# Altium PCB ufd.PcbDoc
Units mil, origin at the board's own origin, x right, y up, seen from the top; angles counter-clockwise.
Board outline 9000 x 7000 mil, 8 copper layers (Top Layer, Ground, Signal, Power, Power2, Signal2, Ground2, Bottom Layer); 77 components, 62 nets, 719 pads, 54 vias.
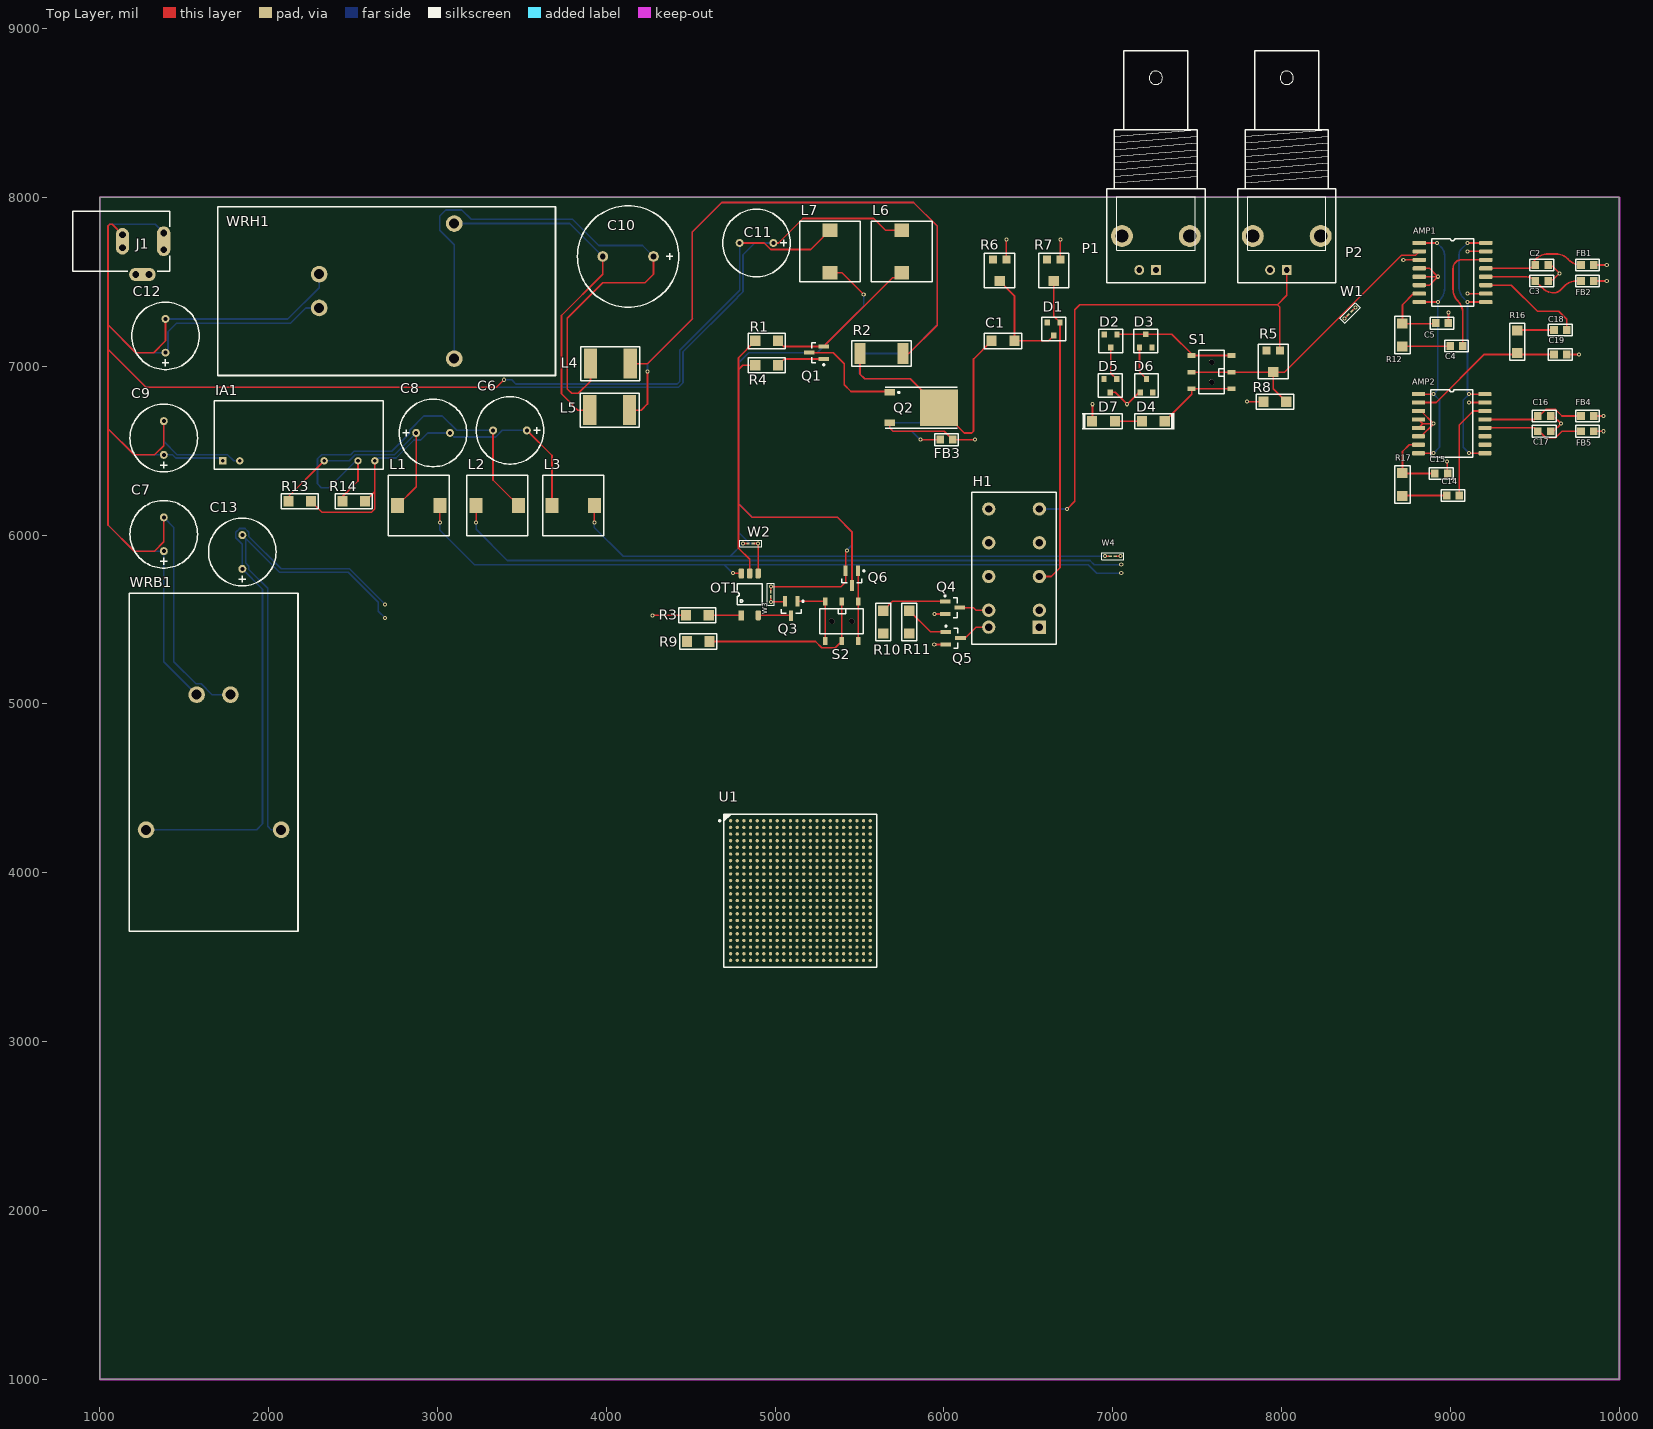
[diagram p0: Top Layer view]
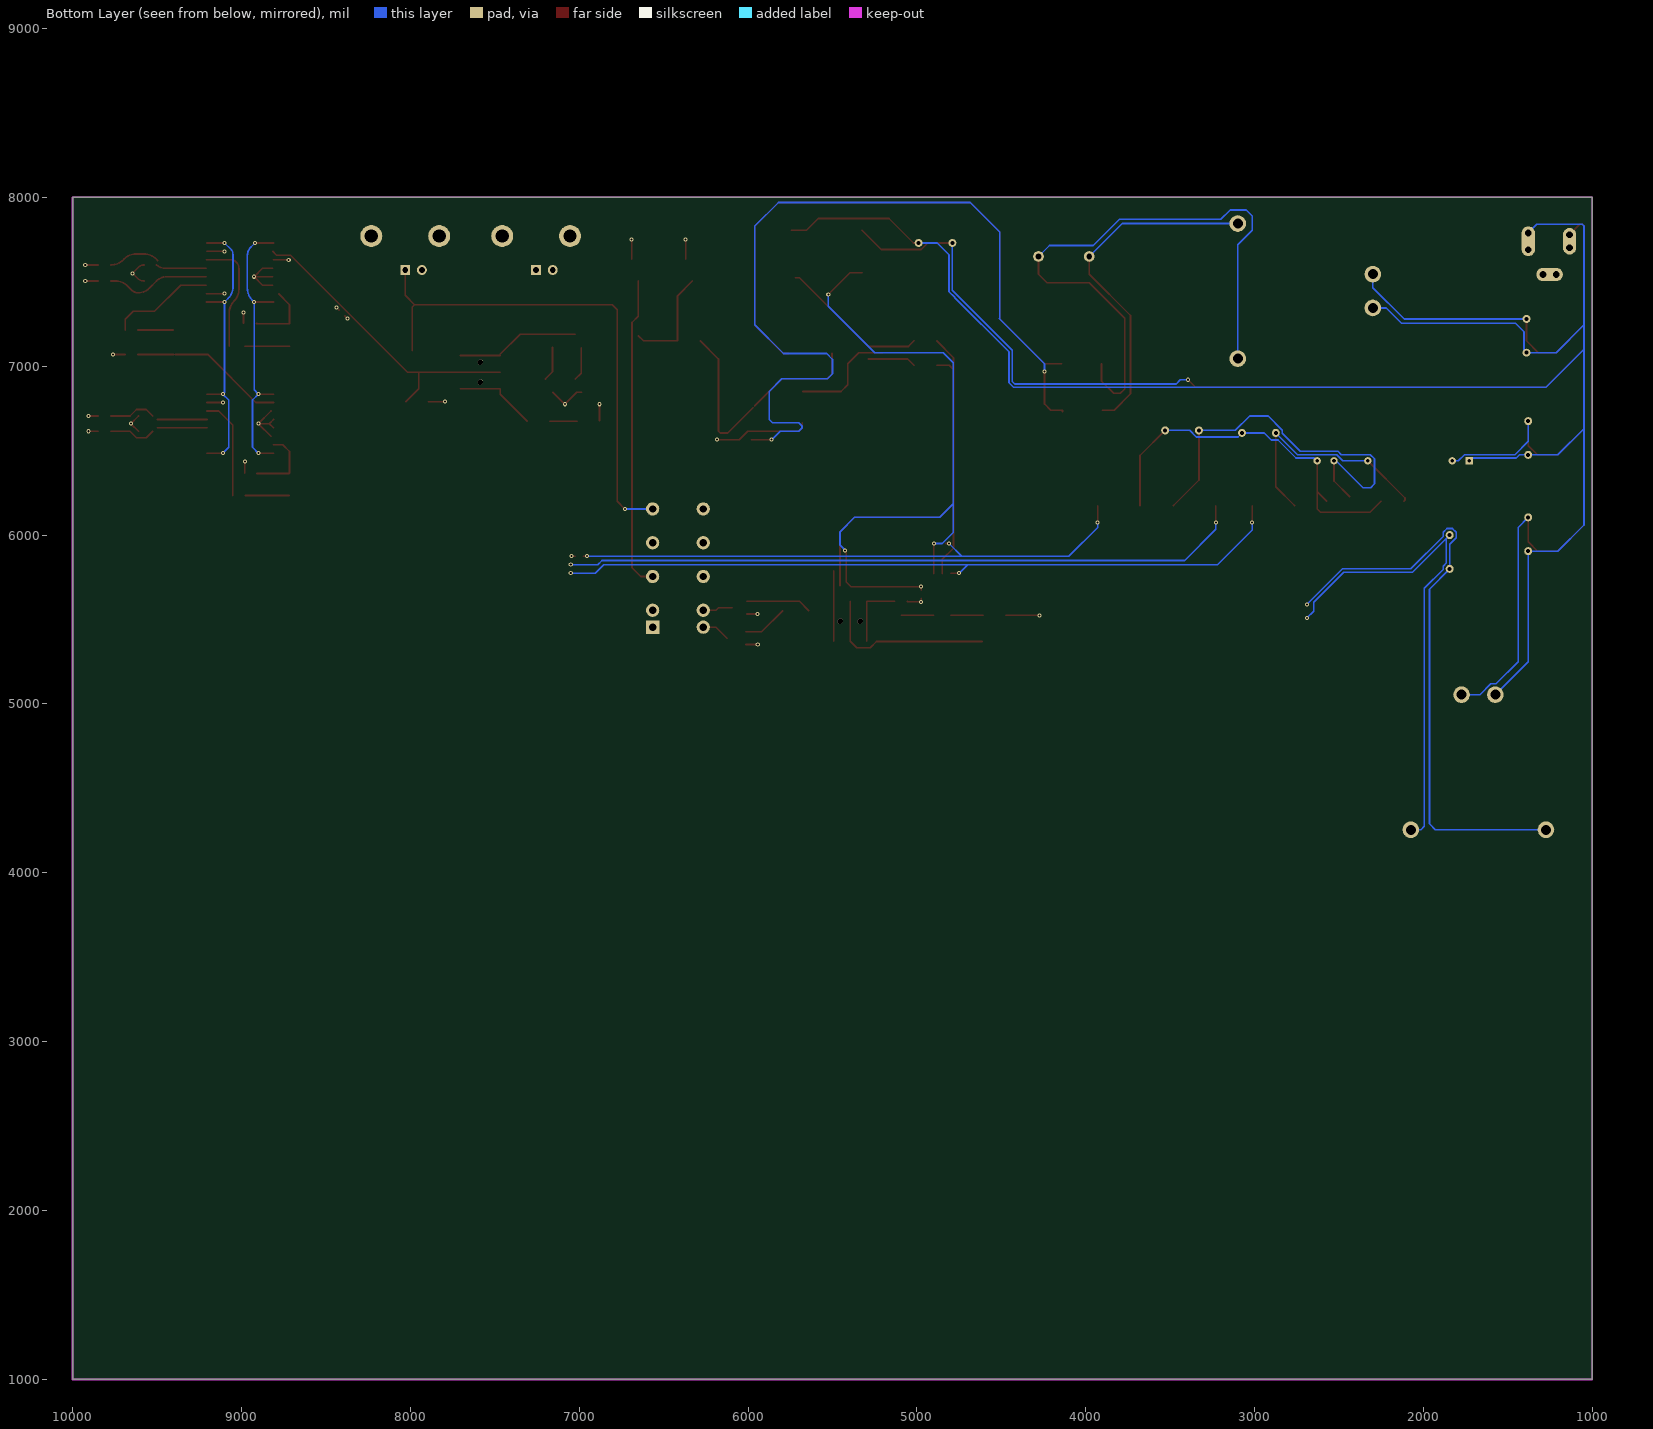
[diagram p1: Bottom Layer view, seen from below]
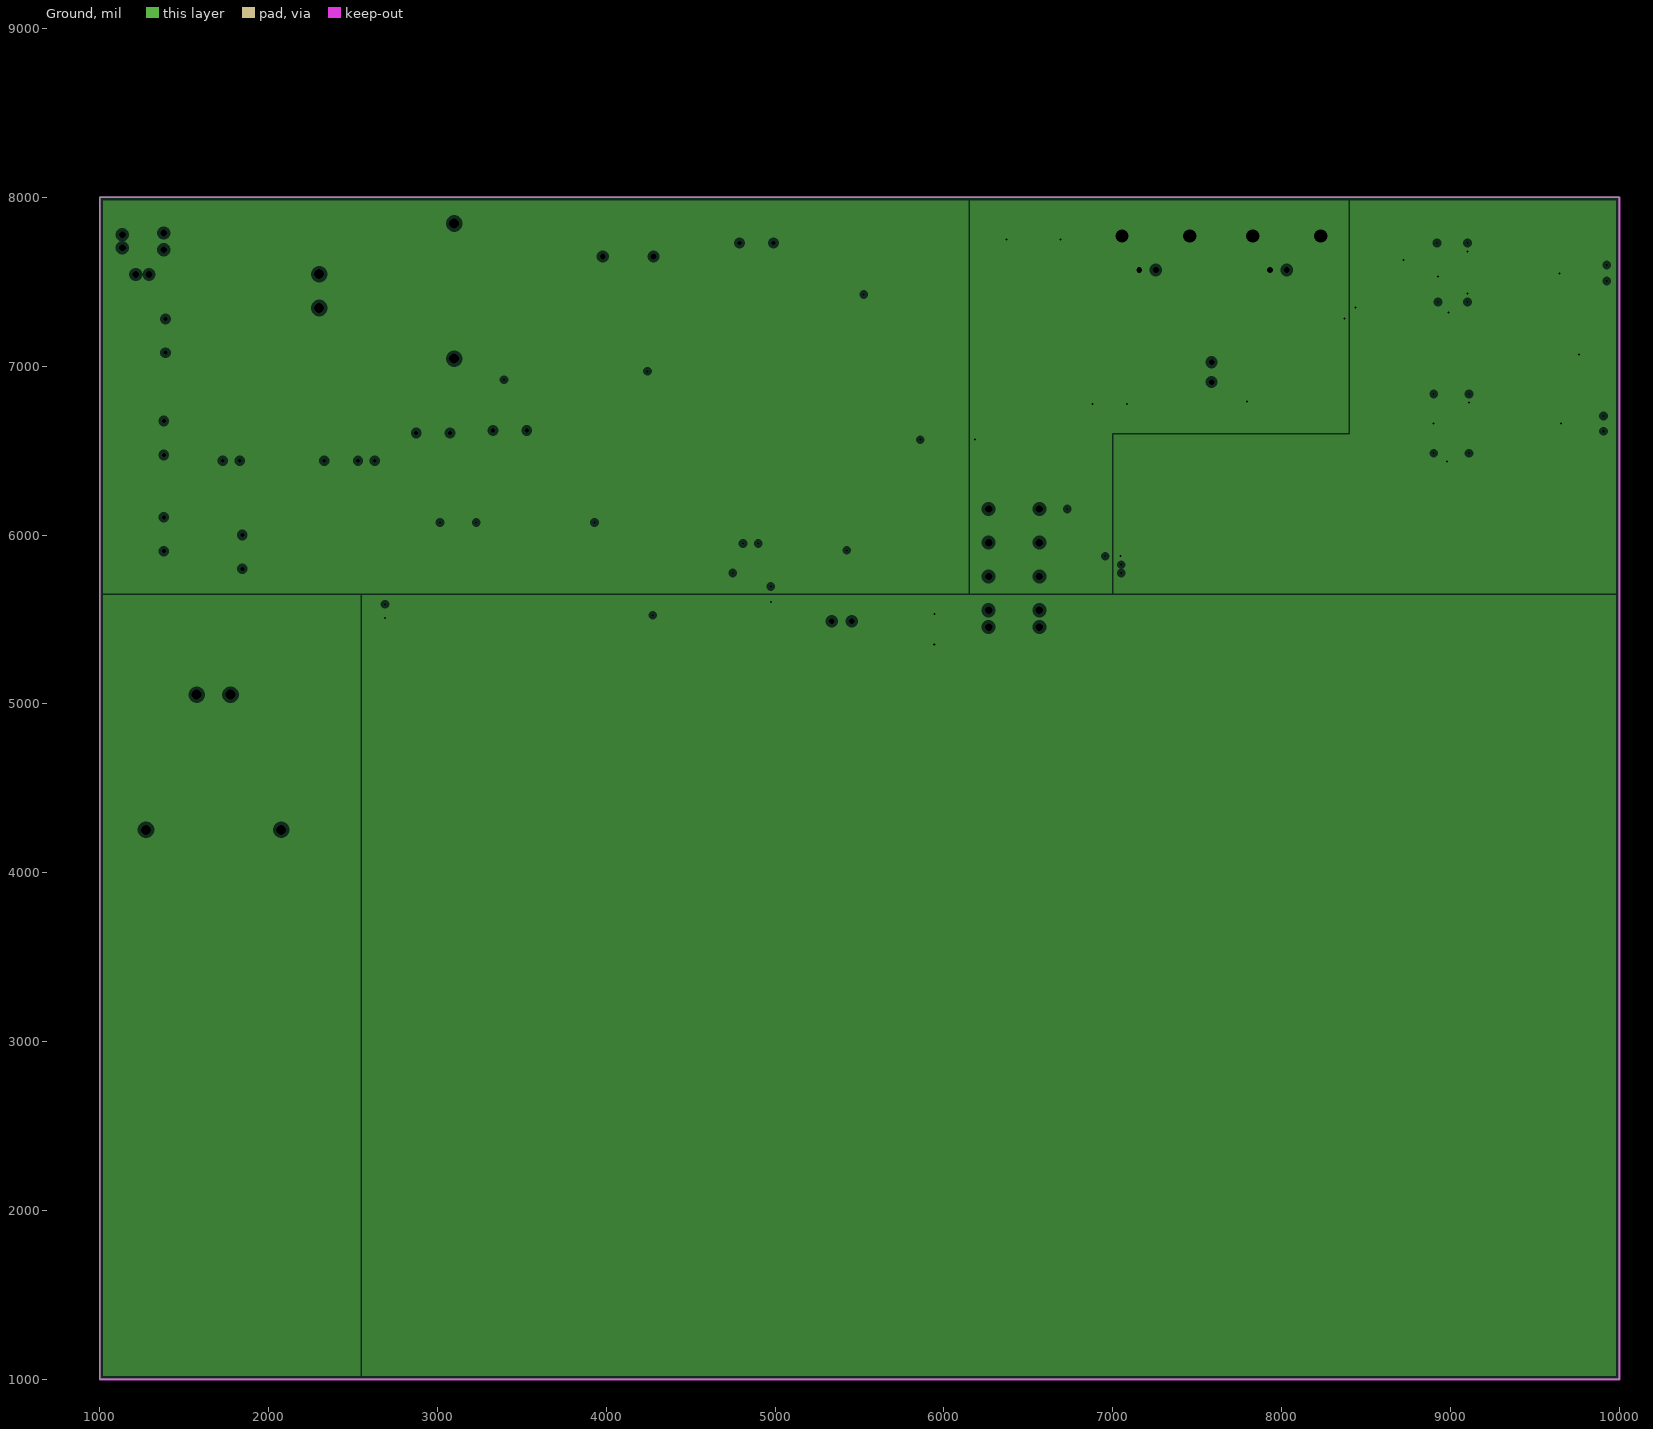
[diagram p2: Ground, clearances drawn from the general rule]
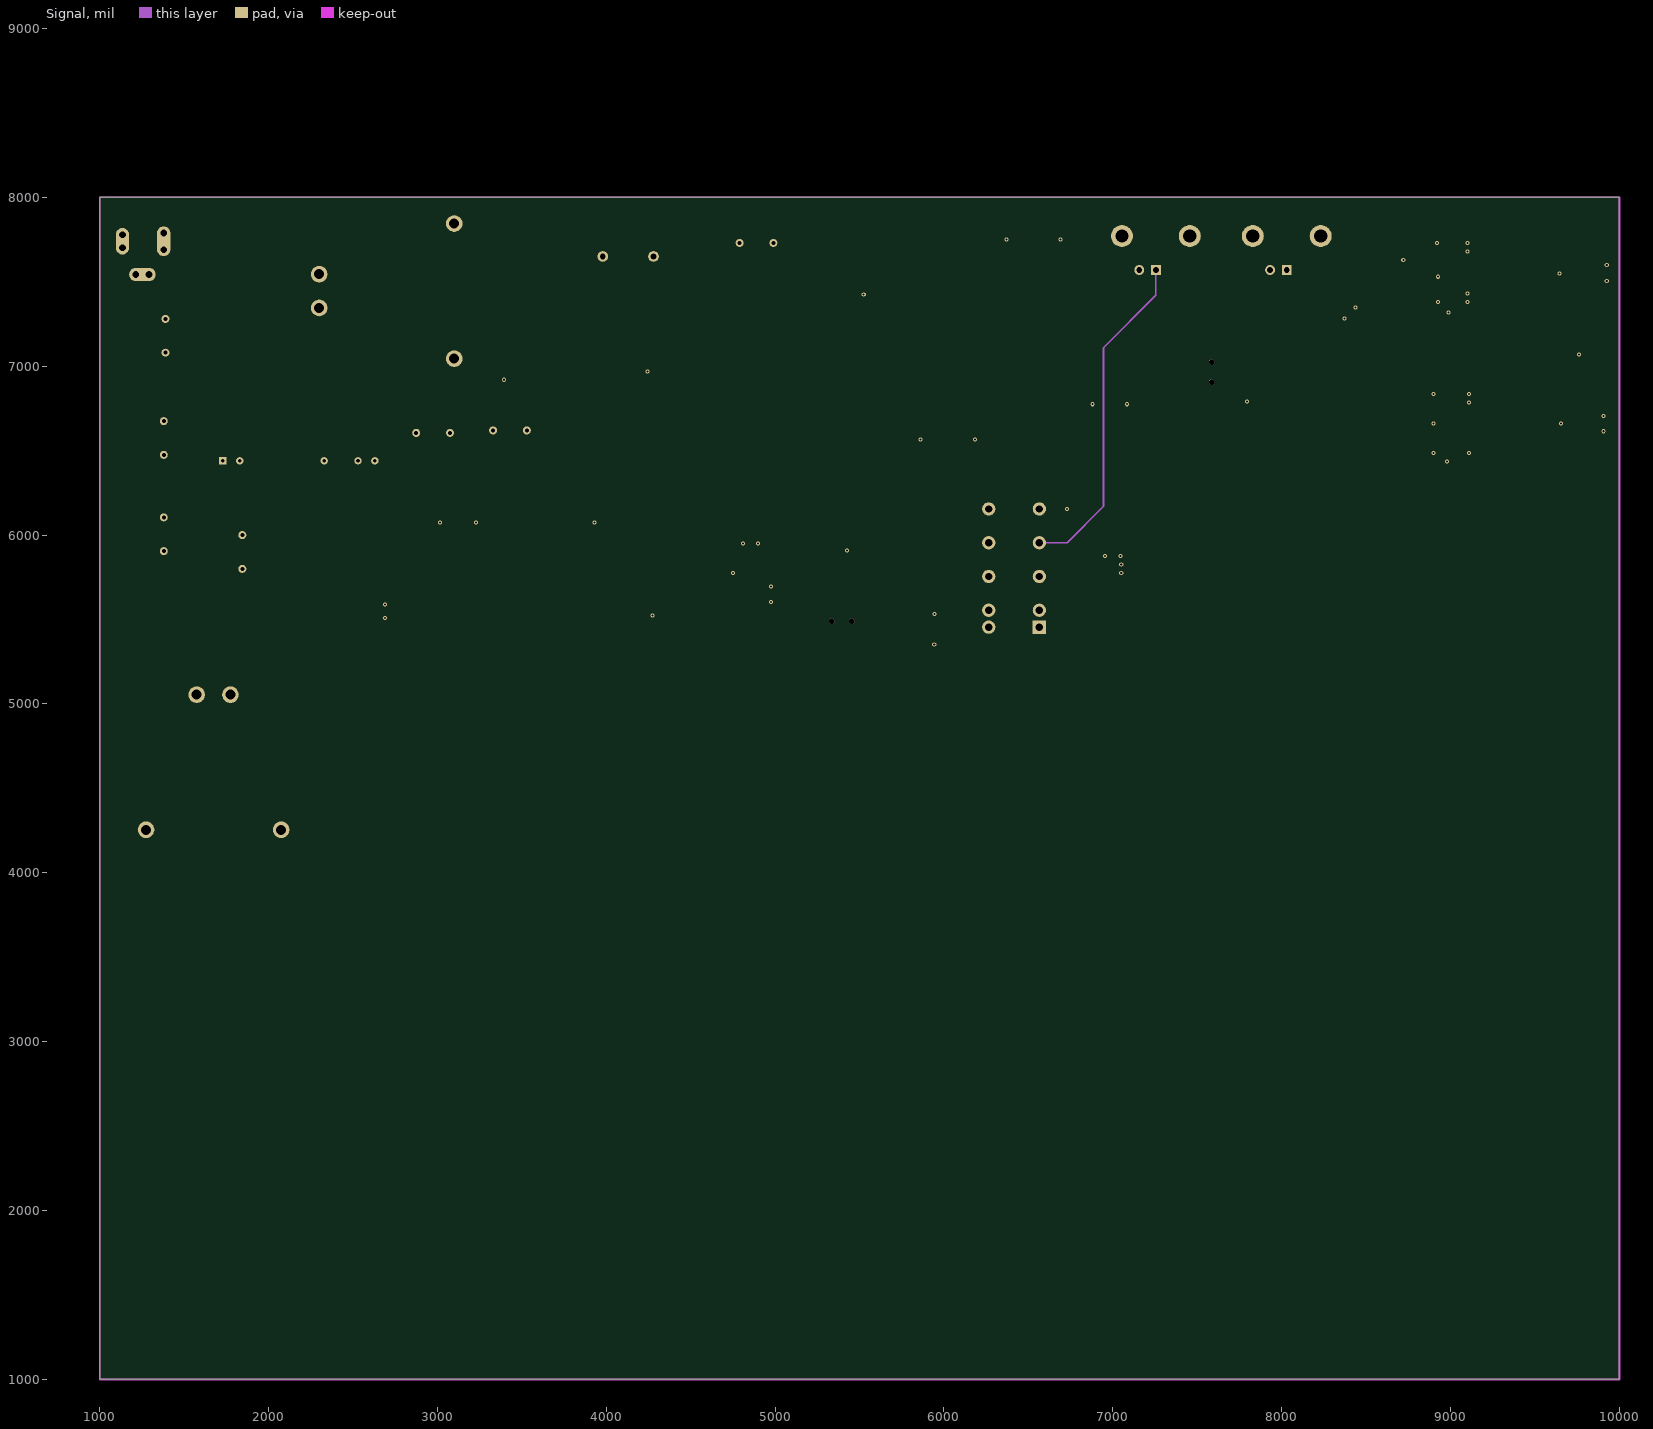
[diagram p3: Signal]
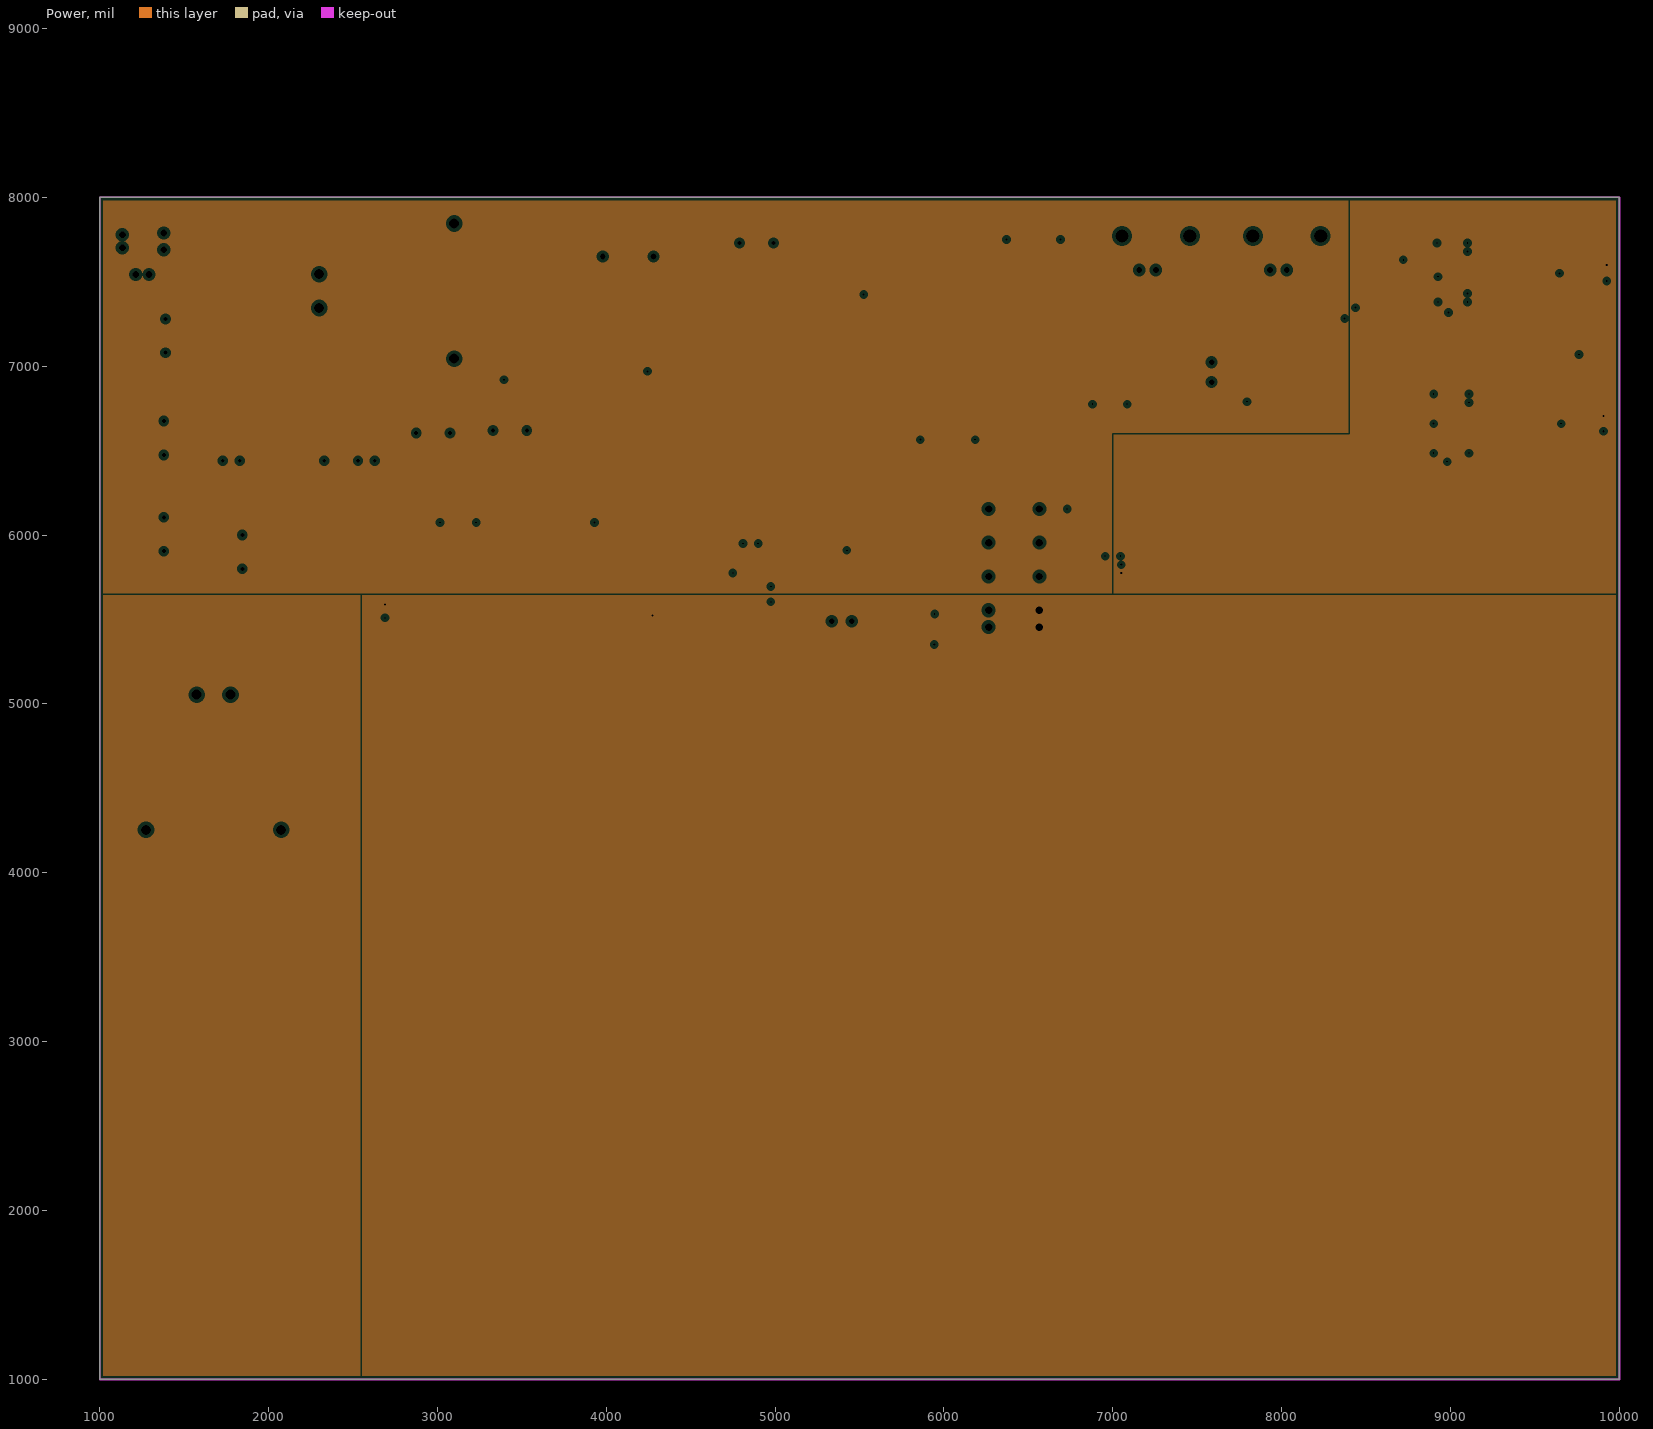
[diagram p4: Power, clearances drawn from the general rule]
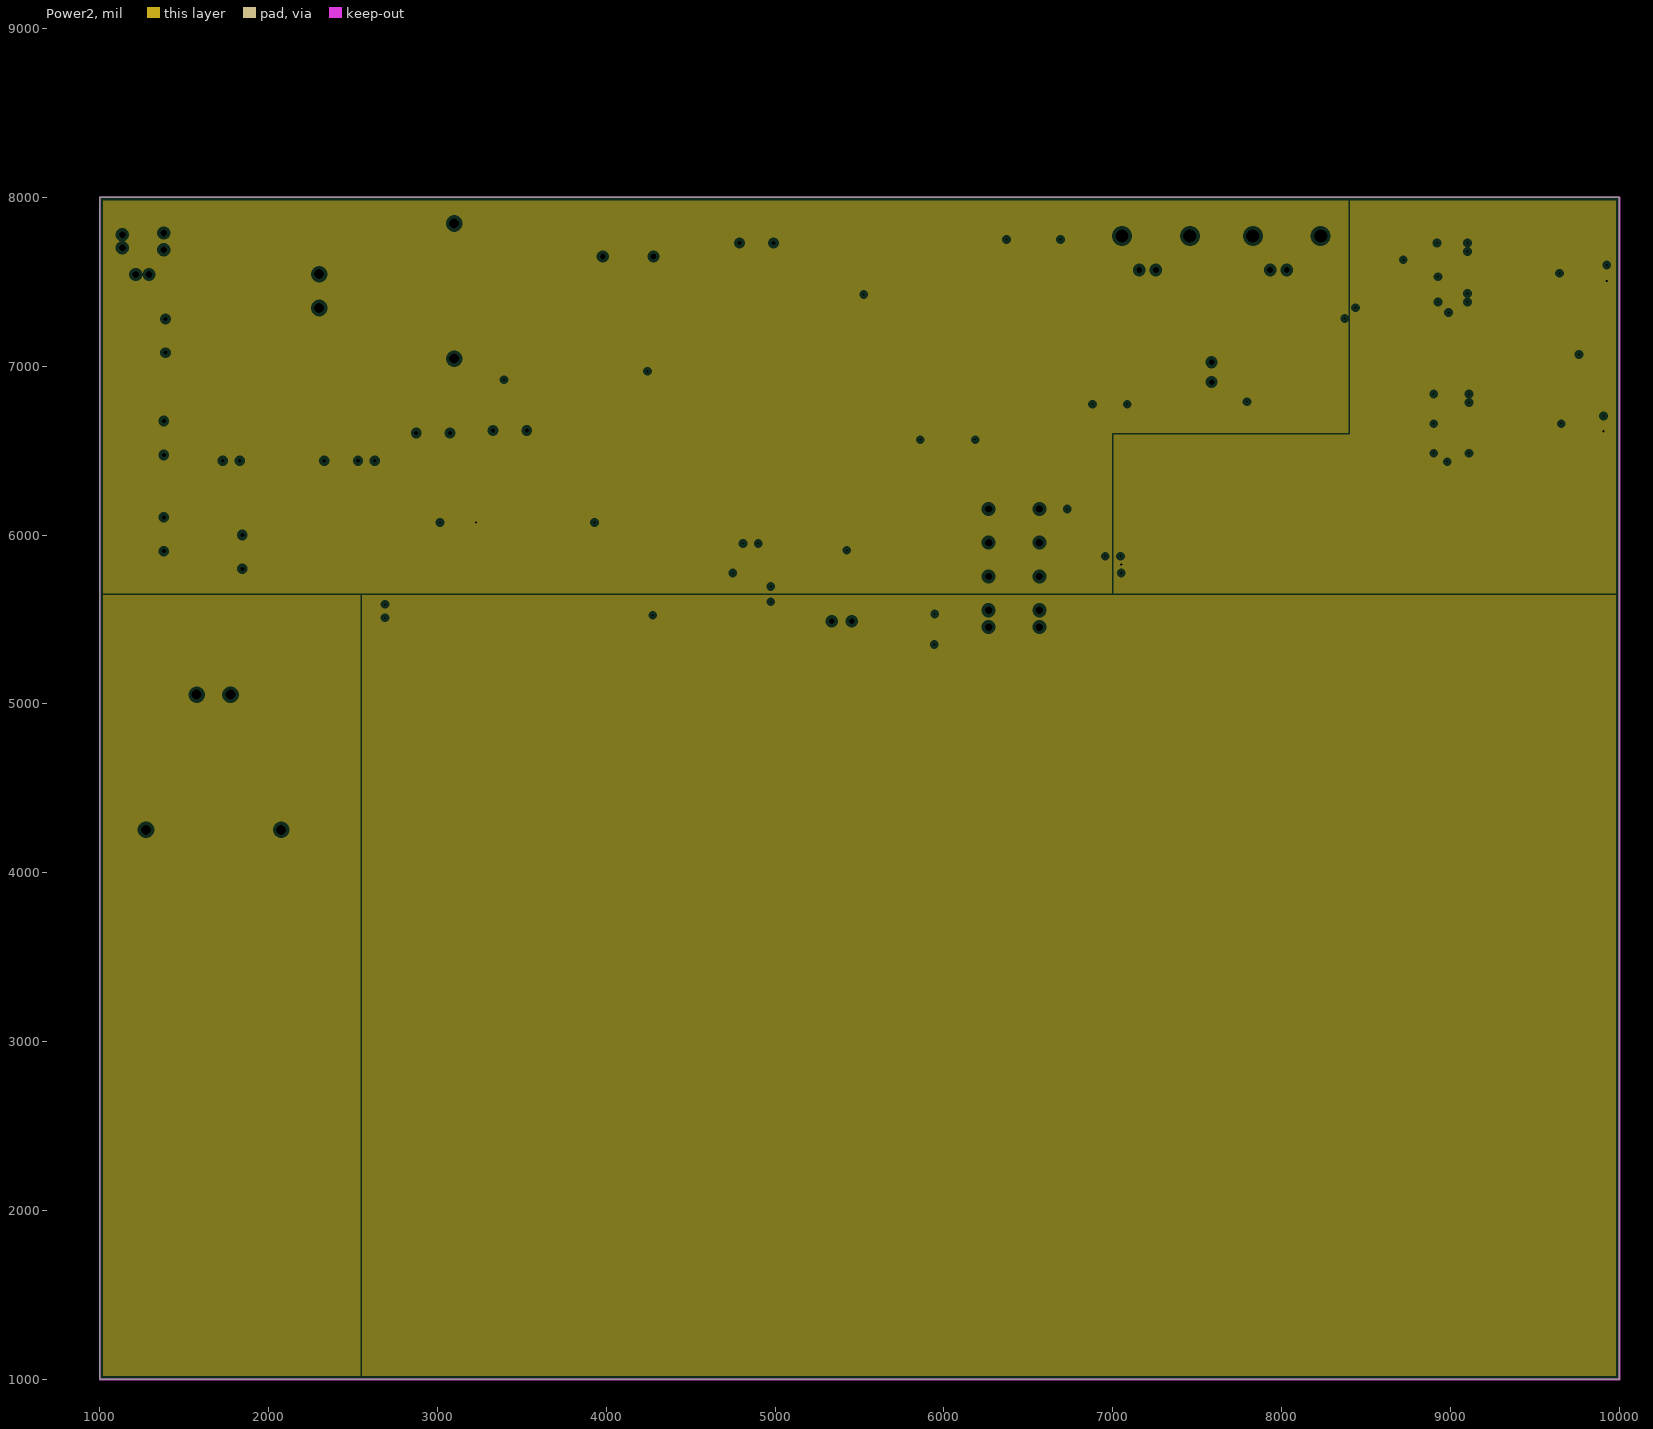
[diagram p5: Power2, clearances drawn from the general rule]
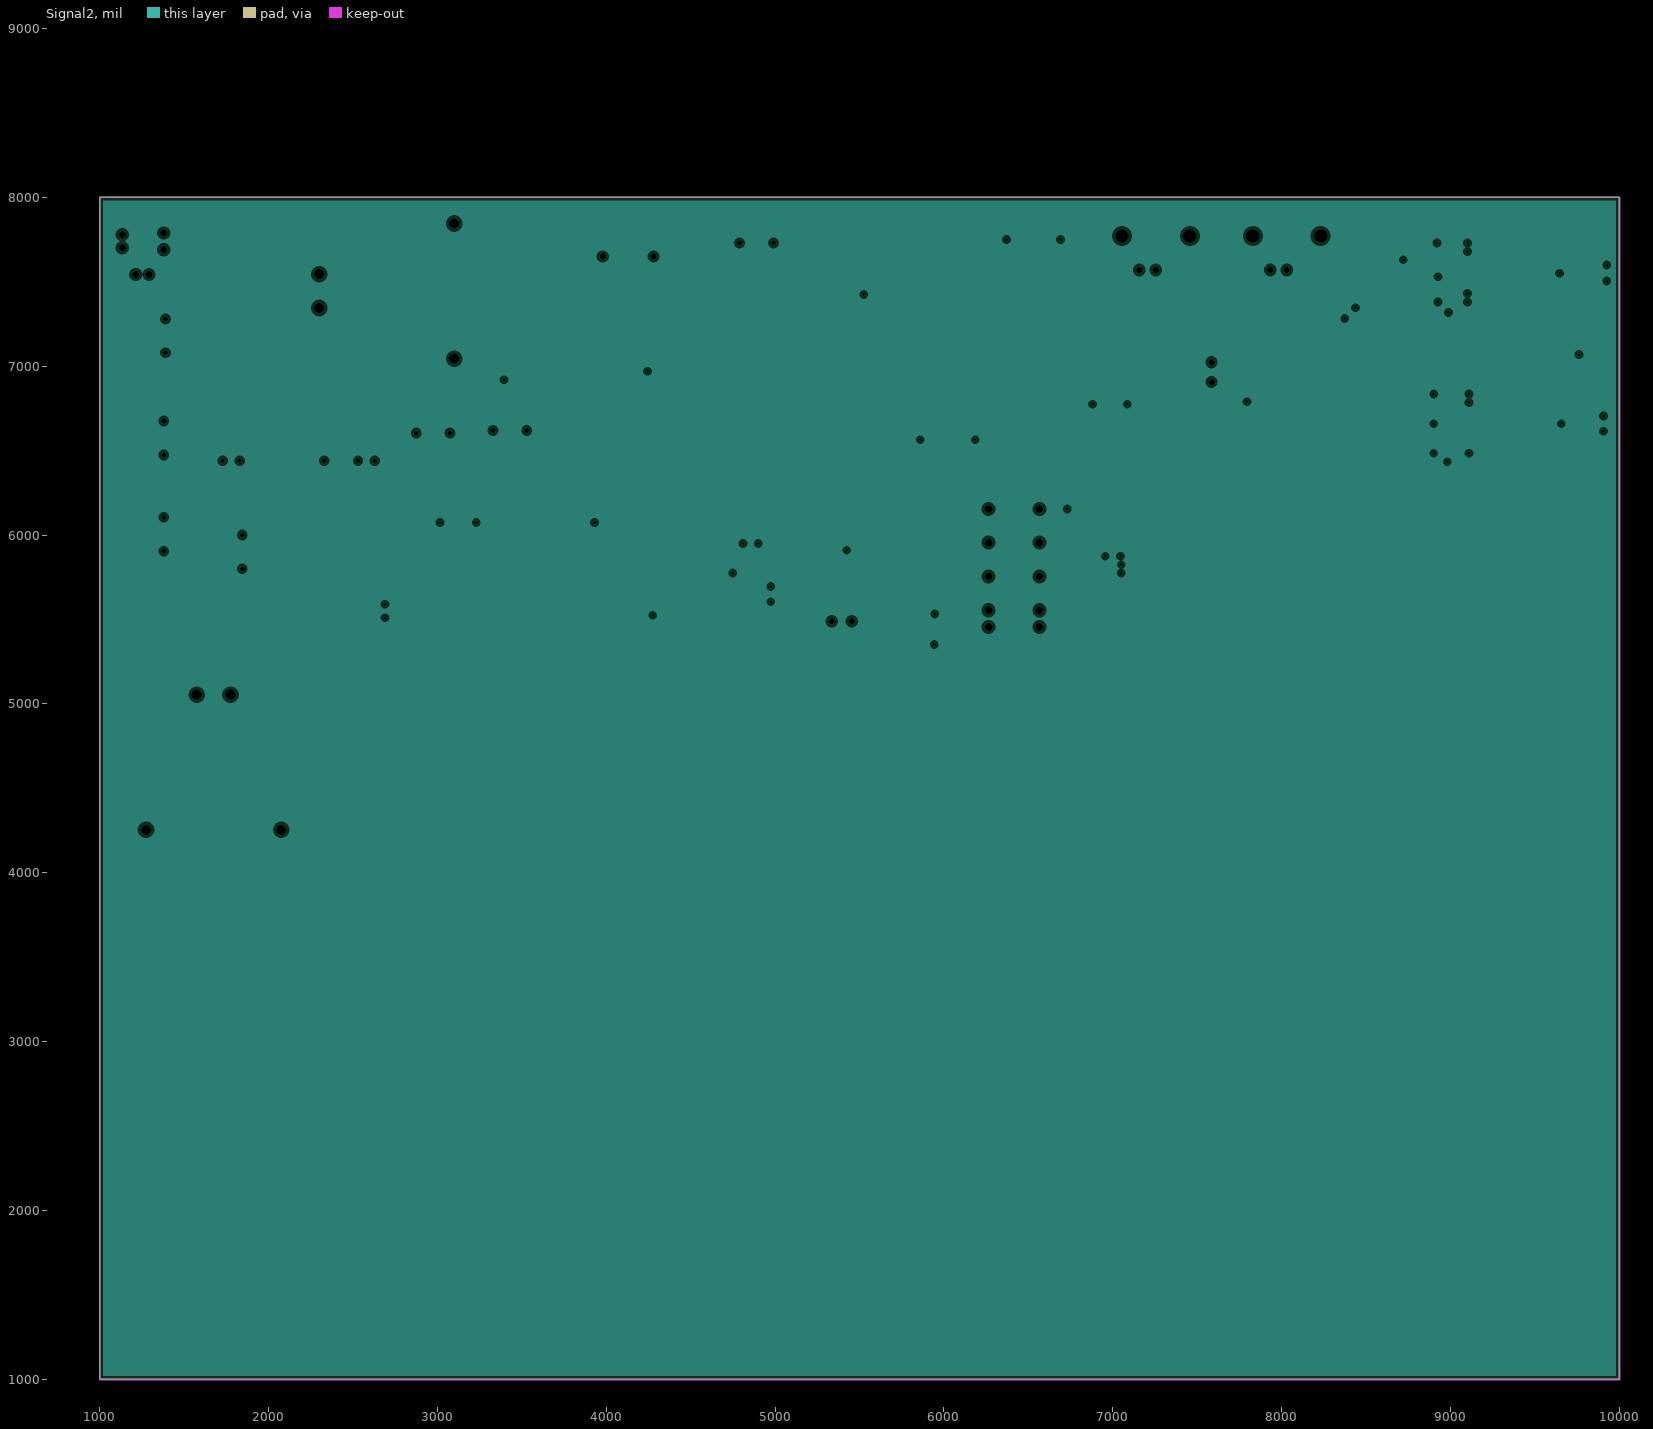
[diagram p6: Signal2, clearances drawn from the general rule]
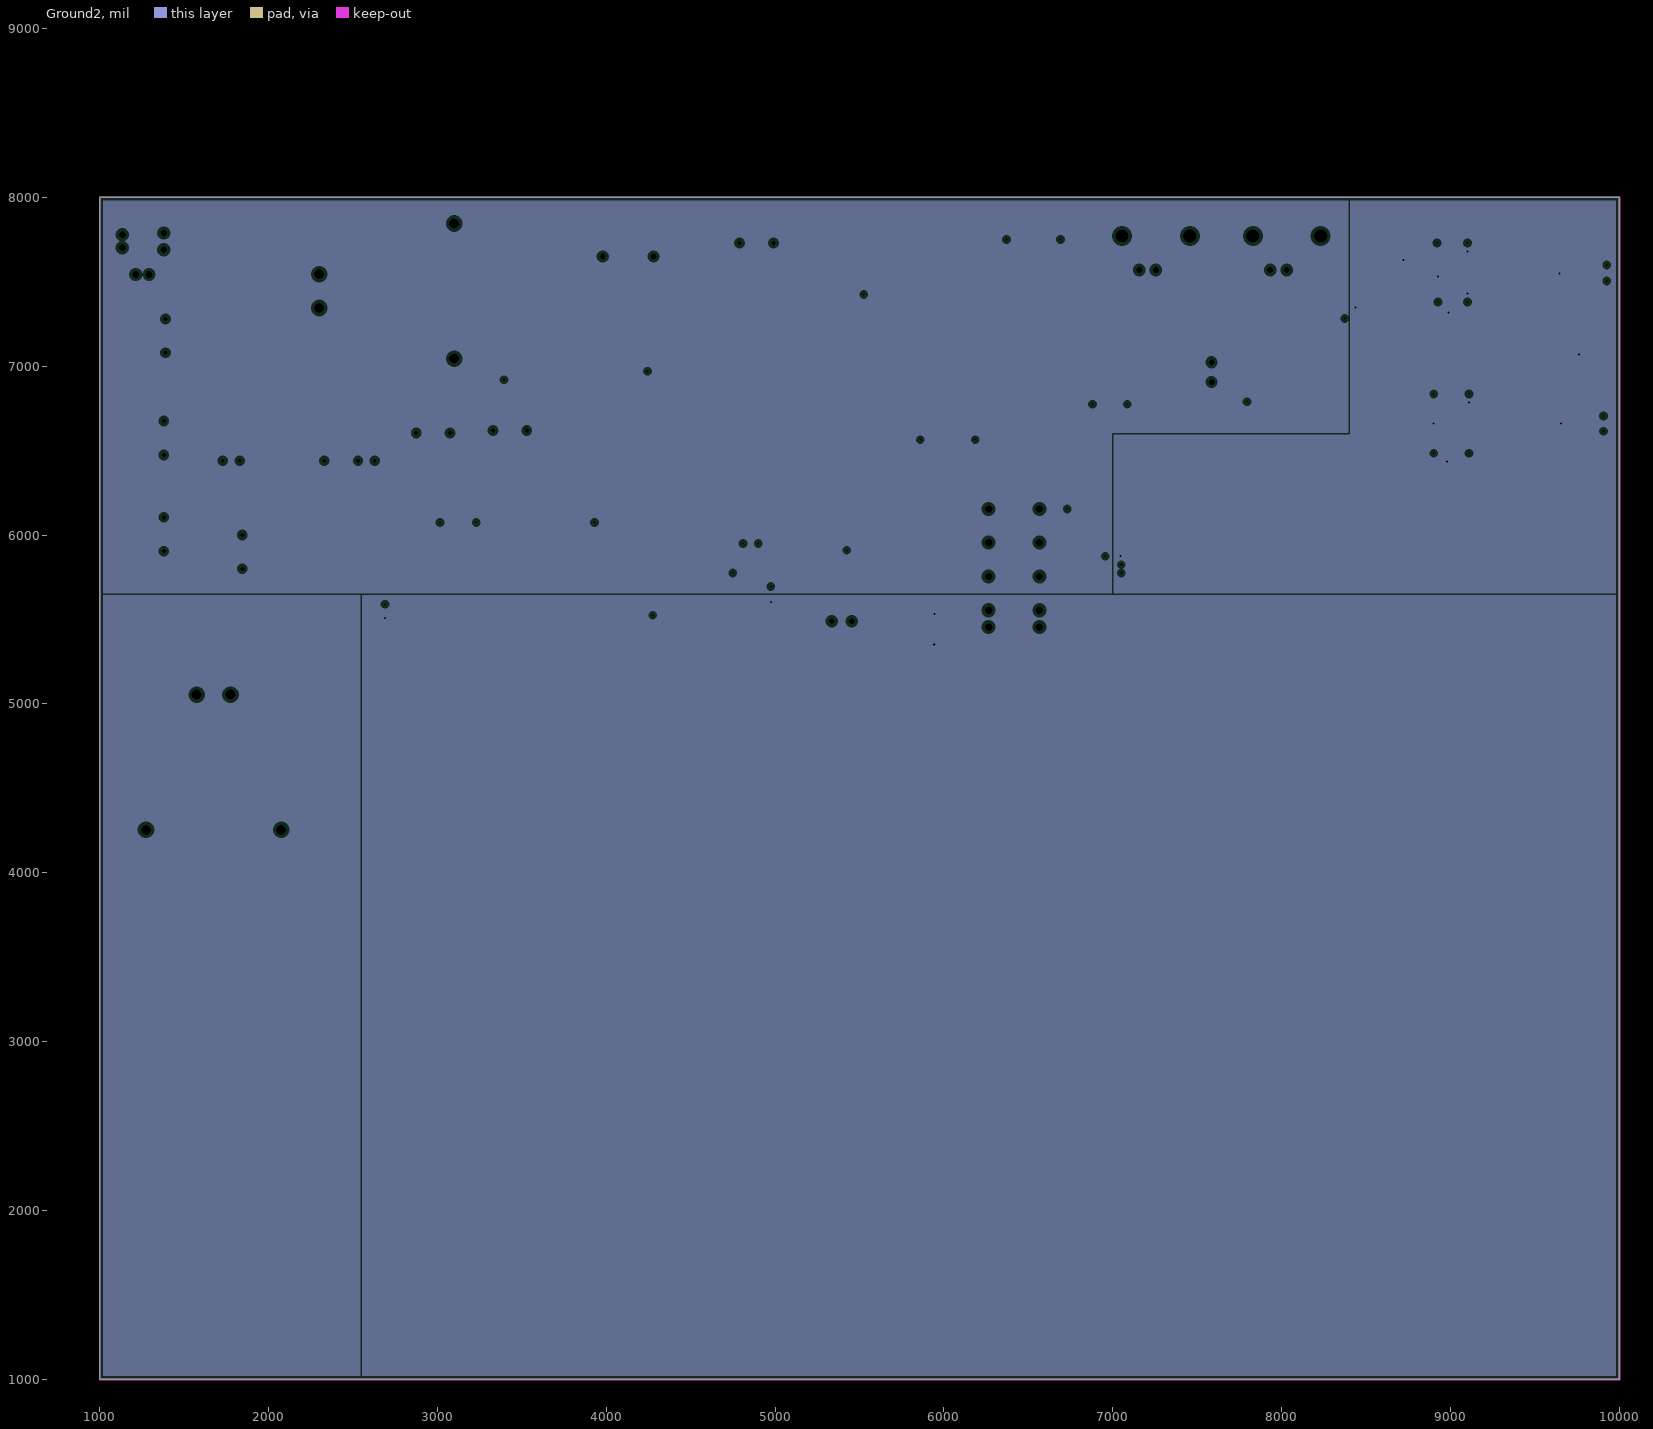
[diagram p7: Ground2, clearances drawn from the general rule]

## Layer stack, top to bottom
Top Layer: signal copper 1.4
Dielectric: core 12.6, FR-4, Dk 4.8
Ground: plane copper 1.4, net (Multiple Nets)
Dielectric: prepreg 12.6, FR-4, Dk 4.8
Signal: signal copper 1.4
Dielectric: core 12.6, FR-4, Dk 4.8
Power: plane copper 1.4, net (Multiple Nets)
Dielectric: prepreg 12.6, FR-4, Dk 4.8
Power2: plane copper 1.4, net -5V
Dielectric: core 12.6, FR-4, Dk 4.8
Signal2: plane copper 1.4
Dielectric: prepreg 12.6, FR-4, Dk 4.8
Ground2: plane copper 1.4, net (Multiple Nets)
Dielectric: core 12.6, FR-4, Dk 4.8
Bottom Layer: signal copper 1.4

## Board outline
1000,1000 10000,1000 10000,8000 1000,8000

## Design rules (kind name [scope] priority, off if disabled: settings)
Clearance [All] p1: gap=10
PlaneClearance [All] p1: clearance=20
PlaneConnect [All] p1: planeconnectstyle=Relief reliefexpansion=20 reliefentries=4 reliefconductorwidth=10 reliefairgap=10
PolygonConnect [All] p1: connectstyle=Relief reliefconductorwidth=10 reliefentries=4 polygonreliefangle="90 Angle"
RoutingCorners [All] p1: cornerstyle=Round minsetback=100 maxsetback=100
RoutingVias [All] p1: holewidth=12 width=24 viastyle="Through Hole" minholewidth=12 minwidth=24 maxholewidth=28 maxwidth=50
SilkToSilkClearance [All] p1: silktosilkclearance=0
SilkscreenOverComponentPads [All] p1: minsilkscreentomaskgap=0
SolderMaskExpansion [All] p1: expansion=4
Width [All] p1: maxlimit=10 minlimit=10 preferedwidth=10
23 further rules are at their usual default settings.

## Classes and differential pairs
component class fpga: U1
component class triger: C1 D1 D2 D3 D4 D5 D6 D7 FB3 H1 OT1 P1 P2 Q1 Q2 Q3 Q4 Q5 Q6 R1 R2 R3 R4 R5 R6 R7 R8 R9 R10 R11 S1 S2 W1 W2 W3
component class Power: C6 C7 C8 C9 C10 C11 C12 C13 IA1 J1 L1 L2 L3 L4 L5 L6 L7 R13 R14 WRB1 WRH1
component class amplify: AMP1 AMP2 C2 C3 C4 C5 C14 C15 C16 C17 C18 C19 FB1 FB2 FB4 FB5 R12 R16 R17 W4

## Components (designator, comment, footprint, x,y, rotation, side; value= is the part's Value field where it differs from the comment)
AMP1 "AD602" SOP16 8815,7730 r0 top
AMP2 "AD602" SOP16 8810,6835 r0 top
C1 "C1206" 1206 6350,7150 r0 top
C2 "C0805" 0805 9540,7600 r0 top
C3 "C0805" 0805 9540,7505 r0 top
C4 "C0805" 0805 9035,7120 r0 top
C5 "C0805" 0805 8950,7255 r180 top
C6 "C-RB.2/.4" RB.2/.4 3330,6620 r0 top
C7 "C-RB.2/.4" RB.2/.4 1380,6105 r270 top
C8 "C-RB.2/.4" RB.2/.4 3075,6605 r180 top
C9 "C-RB.2/.4" RB.2/.4 1380,6675 r270 top
C10 "C-RB.3/.6" RB.3/.6 3980,7650 r0 top
C11 "C-RB.2/.4" RB.2/.4 4790,7730 r0 top
C12 "C-RB.2/.4" RB.2/.4 1390,7280 r270 top
C13 "C-RB.2/.4" RB.2/.4 1845,6000 r270 top
C14 "C0805" 0805 9015,6235 r0 top
C15 "C0805" 0805 8945,6365 r180 top
C16 "C0805" 0805 9555,6705 r0 top
C17 "C0805" 0805 9555,6615 r0 top
C18 "C0805" 0805 9650,7215 r0 top
C19 "C0805" 0805 9650,7070 r180 top
D1 "SMMBD914LT3G" SMMBD914LT3G 6650,7220 r270 top
D2 "SMMBD914LT3G" SMMBD914LT3G 6987.6,7149.37 r270 top
D3 "SMMBD914LT3G" SMMBD914LT3G 7195,7150 r90 top
D4 "ZMM2V4" DIODE1206 7240,6675 r0 top
D5 "SMMBD914LT3G" SMMBD914LT3G 6985,6885 r270 top
D6 "SMMBD914LT3G" SMMBD914LT3G 7200,6885 r90 top
D7 "ZMM2V4" DIODE1206 6945,6675 r180 top
FB1 "FB0805" 0805 9810,7600 r0 top
FB2 "FB0805" 0805 9810,7505 r180 top
FB3 "FB0805" 0805 6015,6565 r180 top
FB4 "FB0805" 0805 9810,6705 r0 top
FB5 "FB0805" 0805 9810,6615 r180 top
H1 "HDF2-L2" RELAY-HFD2-L2 6565,5455 r180 top
IA1 "IA1205S" IA1205S 1730,6440 r90 top
J1 "PWR2.5" KLD-0202 840,7740 r0 top
L1 "L-CHIP774" INDUCTOR070704 2890,6175 r0 top
L2 "L-CHIP774" INDUCTOR070704 3355,6175 r180 top
L3 "L-CHIP774" INDUCTOR070704 3805,6175 r0 top
L4 "NL565050T-103J" NL565050T 4025,7015 r0 top
L5 "NL565050T-103J" NL565050T 4020,6740 r0 top
L6 "L-CHIP774" INDUCTOR070704 5750,7680 r270 top
L7 "L-CHIP774" INDUCTOR070704 5325,7680 r270 top
OT1 "PC410L" SOP5 4800,5525 r90 top
P1 "BNC" "BNC_RA CON" 7255,7570 r270 top
P2 "BNC" "BNC_RA CON" 8030,7570 r270 top
Q1 "MMBT3906" SOT23_M 5245,7080 r180 top
Q2 "MTD6N10E" 369A-13 5825,6755 r270 top
Q3 "MMBT3904" SOT23_M 5095,5565 r270 top
Q4 "MMBT3904" SOT23_M 6050,5570 r0 top
Q5 "MMBT3904" SOT23_M 6055,5390 r0 top
Q6 "MMBT3904" SOT23_M 5455,5745 r270 top
R1 "R1206" 1206 4950,7150 r0 top
R2 "R2512" 2512 5630,7075 r0 top
R3 "R1206" 1206 4540,5525 r0 top
R4 "R1206" 1206 4950,7005 r0 top
R5 "ResAdj" "Adjust Resistor" 7950,7030 r180 top
R6 "ResAdj" "Adjust Resistor" 6330,7570 r180 top
R7 "ResAdj" "Adjust Resistor" 6650,7570 r180 top
R8 "R1206" 1206 7960,6790 r0 top
R9 "R1206" 1206 4545,5370 r0 top
R10 "R1206" 1206 5640,5485 r90 top
R11 "R1206" 1206 5795,5485 r90 top
R12 "R1206" 1206 8715,7185 r270 top
R13 "R1206" 1206 2185,6200 r180 top
R14 "R1206" 1206 2505,6200 r180 top
R16 "R1206" 1206 9395,7145 r90 top
R17 "R1206" 1206 8715,6300 r270 top
S1 "Switch" MSS-22C02#1 7585,6965 r180 top
S2 "Switch" MSS-22C02#2 5395,5490 r270 top
U1 "EP4CE30F23C7" FBGA484 5150,3895 r0 top
W1 "Wire" WIRE#1 8405,7315 r45 top
W2 "Wire" WIRE#1 4855,5950 r180 top
W3 "Wire" WIRE#2 4975,5650 r90 top
W4 "Wire" WIRE#1 7000,5875 r180 top
WRB1 "WRB1205MD-10W" WRB1205MD-10W 1675,4655 r270 top
WRH1 "WRH12400S" WRH12400S 2700,7445 r0 top

## Footprints (in the part's own frame and the unit in brackets; to place one, negate y for a bottom-side part, rotate by r counter-clockwise, add the part's x,y. Pads: shape width x height; smd on the part's side, far side on the other; paste and mask are expansions set on the pad)
369A-13 [mm] "D-PAK/TO-252-AA; 3 Leads (1 Cropped); Body 10.3 (inc. leads) x 6.7 mm (LxW max)"
  rect 1x1.6 smd: 1(-2.285,-3.7) 3(2.285,-3.7)
  rect 5.5x5.7 smd: 4(0,3.7)
  silkscreen extent -3.08,-4.4 3.08,6.45
0805 [mm]
  rect 1.14x1.2 smd: 1(-0.95,0) 2(0.95,0)
  silkscreen extent -1.78,-0.89 1.78,0.89
1206 [mm]
  rect 1.52x1.6 smd: 1(-1.71,0) 2(1.71,0)
  silkscreen extent -2.79,-1.14 2.79,1.14
2512 [mm]
  rect 1.65x3.2 smd: 1(-3.24,0) 2(3.24,0)
  silkscreen extent -4.44,-1.91 4.44,1.91
"Adjust Resistor" [mm] "3 * 3"
  rect 1.2x1.2 smd: a(-1,-1.6) c(1,-1.6)
  rect 1.6x1.5 smd: b(0,1.65)
  silkscreen extent -2.29,-2.54 2.29,2.67
"BNC_RA CON" [mm] "Connector; BNC Elbow"
  rect 1.5x1.5 hole 0.9: 1(0,0)
  round 3.3 hole 2: 2(-5.1,5.1) 2(-5.1,-5.1)
  round 1.5 hole 0.9: 2(0,-2.5)
  silkscreen extent -33,-7.4 1.9,7.4
DIODE1206 [mm]
  rect 1.52x1.6 smd: 1(-1.71,0) 2(1.71,0)
  silkscreen extent -2.79,-1.14 3.17,1.14
FBGA484 [mm] "BGA, 484-Leads, Body 23x23mm, Pitch 1mm"
  round 0.5 smd: A1(-10.5,10.5) A2(-9.5,10.5) A3(-8.5,10.5) A4(-7.5,10.5) A5(-6.5,10.5) A6(-5.5,10.5) A7(-4.5,10.5) A8(-3.5,10.5) A9(-2.5,10.5) A10(-1.5,10.5) A11(-0.5,10.5) A12(0.5,10.5) A13(1.5,10.5) A14(2.5,10.5) A15(3.5,10.5) A16(4.5,10.5) A17(5.5,10.5) A18(6.5,10.5) A19(7.5,10.5) A20(8.5,10.5) A21(9.5,10.5) A22(10.5,10.5) AA1(-10.5,-9.5) AA2(-9.5,-9.5) AA3(-8.5,-9.5) AA4(-7.5,-9.5) AA5(-6.5,-9.5) AA6(-5.5,-9.5) AA7(-4.5,-9.5) AA8(-3.5,-9.5) AA9(-2.5,-9.5) AA10(-1.5,-9.5) AA11(-0.5,-9.5) AA12(0.5,-9.5) AA13(1.5,-9.5) AA14(2.5,-9.5) AA15(3.5,-9.5) AA16(4.5,-9.5) AA17(5.5,-9.5) AA18(6.5,-9.5) AA19(7.5,-9.5) AA20(8.5,-9.5) AA21(9.5,-9.5) AA22(10.5,-9.5) AB1(-10.5,-10.5) AB2(-9.5,-10.5) AB3(-8.5,-10.5) AB4(-7.5,-10.5) AB5(-6.5,-10.5) AB6(-5.5,-10.5) AB7(-4.5,-10.5) AB8(-3.5,-10.5) AB9(-2.5,-10.5) AB10(-1.5,-10.5) AB11(-0.5,-10.5) AB12(0.5,-10.5) AB13(1.5,-10.5) AB14(2.5,-10.5) AB15(3.5,-10.5) AB16(4.5,-10.5) AB17(5.5,-10.5) AB18(6.5,-10.5) AB19(7.5,-10.5) AB20(8.5,-10.5) AB21(9.5,-10.5) AB22(10.5,-10.5) B1(-10.5,9.5) B2(-9.5,9.5) B3(-8.5,9.5) B4(-7.5,9.5) B5(-6.5,9.5) B6(-5.5,9.5) B7(-4.5,9.5) B8(-3.5,9.5) B9(-2.5,9.5) B10(-1.5,9.5) B11(-0.5,9.5) B12(0.5,9.5) B13(1.5,9.5) B14(2.5,9.5) B15(3.5,9.5) B16(4.5,9.5) B17(5.5,9.5) B18(6.5,9.5) B19(7.5,9.5) B20(8.5,9.5) B21(9.5,9.5) B22(10.5,9.5) C1(-10.5,8.5) C2(-9.5,8.5) C3(-8.5,8.5) C4(-7.5,8.5) C5(-6.5,8.5) C6(-5.5,8.5) C7(-4.5,8.5) C8(-3.5,8.5) C9(-2.5,8.5) C10(-1.5,8.5) C11(-0.5,8.5) C12(0.5,8.5) C13(1.5,8.5) C14(2.5,8.5) C15(3.5,8.5) C16(4.5,8.5) C17(5.5,8.5) C18(6.5,8.5) C19(7.5,8.5) C20(8.5,8.5) C21(9.5,8.5) C22(10.5,8.5) D1(-10.5,7.5) D2(-9.5,7.5) D3(-8.5,7.5) D4(-7.5,7.5) D5(-6.5,7.5) D6(-5.5,7.5) D7(-4.5,7.5) D8(-3.5,7.5) D9(-2.5,7.5) D10(-1.5,7.5) D11(-0.5,7.5) D12(0.5,7.5) D13(1.5,7.5) D14(2.5,7.5) D15(3.5,7.5) D16(4.5,7.5) D17(5.5,7.5) D18(6.5,7.5) D19(7.5,7.5) D20(8.5,7.5) D21(9.5,7.5) D22(10.5,7.5) E1(-10.5,6.5) E2(-9.5,6.5) E3(-8.5,6.5) E4(-7.5,6.5) E5(-6.5,6.5) E6(-5.5,6.5) E7(-4.5,6.5) E8(-3.5,6.5) E9(-2.5,6.5) E10(-1.5,6.5) E11(-0.5,6.5) E12(0.5,6.5) E13(1.5,6.5) E14(2.5,6.5) E15(3.5,6.5) E16(4.5,6.5) E17(5.5,6.5) E18(6.5,6.5) E19(7.5,6.5) E20(8.5,6.5) E21(9.5,6.5) E22(10.5,6.5) F1(-10.5,5.5) F2(-9.5,5.5) F3(-8.5,5.5) F4(-7.5,5.5) F5(-6.5,5.5) F6(-5.5,5.5) F7(-4.5,5.5) F8(-3.5,5.5) F9(-2.5,5.5) F10(-1.5,5.5) F11(-0.5,5.5) F12(0.5,5.5) F13(1.5,5.5) F14(2.5,5.5) F15(3.5,5.5) F16(4.5,5.5) F17(5.5,5.5) F18(6.5,5.5) F19(7.5,5.5) F20(8.5,5.5) F21(9.5,5.5) F22(10.5,5.5) G1(-10.5,4.5) G2(-9.5,4.5) G3(-8.5,4.5) G4(-7.5,4.5) G5(-6.5,4.5) G6(-5.5,4.5) G7(-4.5,4.5) G8(-3.5,4.5) G9(-2.5,4.5) G10(-1.5,4.5) G11(-0.5,4.5) G12(0.5,4.5) G13(1.5,4.5) G14(2.5,4.5) G15(3.5,4.5) G16(4.5,4.5) G17(5.5,4.5) G18(6.5,4.5) G19(7.5,4.5) G20(8.5,4.5) G21(9.5,4.5) G22(10.5,4.5) H1(-10.5,3.5) H2(-9.5,3.5) H3(-8.5,3.5) H4(-7.5,3.5) H5(-6.5,3.5) H6(-5.5,3.5) H7(-4.5,3.5) H8(-3.5,3.5) H9(-2.5,3.5) H10(-1.5,3.5) H11(-0.5,3.5) H12(0.5,3.5) H13(1.5,3.5) H14(2.5,3.5) H15(3.5,3.5) H16(4.5,3.5) H17(5.5,3.5) H18(6.5,3.5) H19(7.5,3.5) H20(8.5,3.5) H21(9.5,3.5) H22(10.5,3.5) J1(-10.5,2.5) J2(-9.5,2.5) J3(-8.5,2.5) J4(-7.5,2.5) J5(-6.5,2.5) J6(-5.5,2.5) J7(-4.5,2.5) J8(-3.5,2.5) J9(-2.5,2.5) J10(-1.5,2.5) J11(-0.5,2.5) J12(0.5,2.5) J13(1.5,2.5) J14(2.5,2.5) J15(3.5,2.5) J16(4.5,2.5) J17(5.5,2.5) J18(6.5,2.5) J19(7.5,2.5) J20(8.5,2.5) J21(9.5,2.5) J22(10.5,2.5) K1(-10.5,1.5) K2(-9.5,1.5) K3(-8.5,1.5) K4(-7.5,1.5) K5(-6.5,1.5) K6(-5.5,1.5) K7(-4.5,1.5) K8(-3.5,1.5) K9(-2.5,1.5) K10(-1.5,1.5) K11(-0.5,1.5) K12(0.5,1.5) K13(1.5,1.5) K14(2.5,1.5) K15(3.5,1.5) K16(4.5,1.5) K17(5.5,1.5) K18(6.5,1.5) K19(7.5,1.5) K20(8.5,1.5) K21(9.5,1.5) K22(10.5,1.5) L1(-10.5,0.5) L2(-9.5,0.5) L3(-8.5,0.5) L4(-7.5,0.5) L5(-6.5,0.5) L6(-5.5,0.5) L7(-4.5,0.5) L8(-3.5,0.5) L9(-2.5,0.5) L10(-1.5,0.5) L11(-0.5,0.5) L12(0.5,0.5) L13(1.5,0.5) L14(2.5,0.5) L15(3.5,0.5) L16(4.5,0.5) L17(5.5,0.5) L18(6.5,0.5) L19(7.5,0.5) L20(8.5,0.5) L21(9.5,0.5) L22(10.5,0.5) M1(-10.5,-0.5) M2(-9.5,-0.5) M3(-8.5,-0.5) M4(-7.5,-0.5) M5(-6.5,-0.5) M6(-5.5,-0.5) M7(-4.5,-0.5) M8(-3.5,-0.5) M9(-2.5,-0.5) M10(-1.5,-0.5) M11(-0.5,-0.5) M12(0.5,-0.5) M13(1.5,-0.5) M14(2.5,-0.5) M15(3.5,-0.5) M16(4.5,-0.5) M17(5.5,-0.5) M18(6.5,-0.5) M19(7.5,-0.5) M20(8.5,-0.5) M21(9.5,-0.5) M22(10.5,-0.5) N1(-10.5,-1.5) N2(-9.5,-1.5) N3(-8.5,-1.5) N4(-7.5,-1.5) N5(-6.5,-1.5) N6(-5.5,-1.5) N7(-4.5,-1.5) N8(-3.5,-1.5) N9(-2.5,-1.5) N10(-1.5,-1.5) N11(-0.5,-1.5) N12(0.5,-1.5) N13(1.5,-1.5) N14(2.5,-1.5) N15(3.5,-1.5) N16(4.5,-1.5) N17(5.5,-1.5) N18(6.5,-1.5) N19(7.5,-1.5) N20(8.5,-1.5) N21(9.5,-1.5) N22(10.5,-1.5) P1(-10.5,-2.5) P2(-9.5,-2.5) P3(-8.5,-2.5) P4(-7.5,-2.5) P5(-6.5,-2.5) P6(-5.5,-2.5) P7(-4.5,-2.5) P8(-3.5,-2.5) P9(-2.5,-2.5) P10(-1.5,-2.5) P11(-0.5,-2.5) P12(0.5,-2.5) P13(1.5,-2.5) P14(2.5,-2.5) P15(3.5,-2.5) P16(4.5,-2.5) P17(5.5,-2.5) P18(6.5,-2.5) P19(7.5,-2.5) P20(8.5,-2.5) P21(9.5,-2.5) P22(10.5,-2.5) R1(-10.5,-3.5) R2(-9.5,-3.5) R3(-8.5,-3.5) R4(-7.5,-3.5) R5(-6.5,-3.5) R6(-5.5,-3.5) R7(-4.5,-3.5) R8(-3.5,-3.5) R9(-2.5,-3.5) R10(-1.5,-3.5) R11(-0.5,-3.5) R12(0.5,-3.5) R13(1.5,-3.5) R14(2.5,-3.5) R15(3.5,-3.5) R16(4.5,-3.5) R17(5.5,-3.5) R18(6.5,-3.5) R19(7.5,-3.5) R20(8.5,-3.5) R21(9.5,-3.5) R22(10.5,-3.5) T1(-10.5,-4.5) T2(-9.5,-4.5) T3(-8.5,-4.5) T4(-7.5,-4.5) T5(-6.5,-4.5) T6(-5.5,-4.5) T7(-4.5,-4.5) T8(-3.5,-4.5) T9(-2.5,-4.5) T10(-1.5,-4.5) T11(-0.5,-4.5) T12(0.5,-4.5) T13(1.5,-4.5) T14(2.5,-4.5) T15(3.5,-4.5) T16(4.5,-4.5) T17(5.5,-4.5) T18(6.5,-4.5) T19(7.5,-4.5) T20(8.5,-4.5) T21(9.5,-4.5) T22(10.5,-4.5) U1(-10.5,-5.5) U2(-9.5,-5.5) U3(-8.5,-5.5) U4(-7.5,-5.5) U5(-6.5,-5.5) U6(-5.5,-5.5) U7(-4.5,-5.5) U8(-3.5,-5.5) U9(-2.5,-5.5) U10(-1.5,-5.5) U11(-0.5,-5.5) U12(0.5,-5.5) U13(1.5,-5.5) U14(2.5,-5.5) U15(3.5,-5.5) U16(4.5,-5.5) U17(5.5,-5.5) U18(6.5,-5.5) U19(7.5,-5.5) U20(8.5,-5.5) U21(9.5,-5.5) U22(10.5,-5.5) V1(-10.5,-6.5) V2(-9.5,-6.5) V3(-8.5,-6.5) V4(-7.5,-6.5) V5(-6.5,-6.5) V6(-5.5,-6.5) V7(-4.5,-6.5) V8(-3.5,-6.5) V9(-2.5,-6.5) V10(-1.5,-6.5) V11(-0.5,-6.5) V12(0.5,-6.5) V13(1.5,-6.5) V14(2.5,-6.5) V15(3.5,-6.5) V16(4.5,-6.5) V17(5.5,-6.5) V18(6.5,-6.5) V19(7.5,-6.5) V20(8.5,-6.5) V21(9.5,-6.5) V22(10.5,-6.5) W1(-10.5,-7.5) W2(-9.5,-7.5) W3(-8.5,-7.5) W4(-7.5,-7.5) W5(-6.5,-7.5) W6(-5.5,-7.5) W7(-4.5,-7.5) W8(-3.5,-7.5) W9(-2.5,-7.5) W10(-1.5,-7.5) W11(-0.5,-7.5) W12(0.5,-7.5) W13(1.5,-7.5) W14(2.5,-7.5) W15(3.5,-7.5) W16(4.5,-7.5) W17(5.5,-7.5) W18(6.5,-7.5) W19(7.5,-7.5) W20(8.5,-7.5) W21(9.5,-7.5) W22(10.5,-7.5) Y1(-10.5,-8.5) Y2(-9.5,-8.5) Y3(-8.5,-8.5) Y4(-7.5,-8.5) Y5(-6.5,-8.5) Y6(-5.5,-8.5) Y7(-4.5,-8.5) Y8(-3.5,-8.5) Y9(-2.5,-8.5) Y10(-1.5,-8.5) Y11(-0.5,-8.5) Y12(0.5,-8.5) Y13(1.5,-8.5) Y14(2.5,-8.5) Y15(3.5,-8.5) Y16(4.5,-8.5) Y17(5.5,-8.5) Y18(6.5,-8.5) Y19(7.5,-8.5) Y20(8.5,-8.5) Y21(9.5,-8.5) Y22(10.5,-8.5)
  silkscreen extent -12.27,-11.5 11.5,11.5, body extent -11.5,-11.5 11.5,11.5, height 3.5
IA1205S [mm]
  rect 1.1x1.1 hole 0.55: 1(0,0)
  round 1.1 hole 0.55: 2(0,-2.54) 7(0,-15.24) 9(0,-20.32) 10(0,-22.86)
  silkscreen extent -1.27,-24.13 9.02,1.27
INDUCTOR070704 [mm]
  rect 2x2.2 smd: 1(-3.2,0) 2(3.2,0)
  silkscreen extent -4.57,-4.57 4.57,4.57
KLD-0202 [mm] "DC Power Jack, 2.5mm, KLD Series, PCB Mount"
  oval 2x4.5 all layers, no hole: 1(13.7,0)
  round 1.5 hole 1: 1A(13.7,-1.25) 1B(13.7,1.25) 2A(7.5,-1) 2B(7.5,1) 3A(9.5,-5) 3B(11.5,-5)
  oval 2x4 all layers, no hole: 2(7.5,0)
  oval 4x2 all layers, no hole: 3(10.5,-5)
  silkscreen extent 0,-4.5 14.6,4.5
MSS-22C02#1 [mm]
  rect 1.2x0.7 smd: a(-3,0) a(3,0) b(-3,2.5) b(3,2.5) c(-3,-2.5) c(3,-2.5)
  round 0.82 hole 0.82: ""(0,1.5) ""(0,-1.5)
  Top Layer lines w0.254: 3,2.5 0,2.5 -3,2.5 ; 3,0 -3,0 ; 3,-2.5 -3,-2.5
  silkscreen extent -1.86,-3.3 1.91,3.26
MSS-22C02#2 [mm]
  rect 1.2x0.7 smd: a(-3,0) a(3,0) b(-3,2.5) b(3,2.5) c(-3,-2.5) c(3,-2.5)
  round 0.82 hole 0.82: ""(0,1.5) ""(0,-1.5)
  Top Layer lines w0.254: 3,-2.5 -3,-2.5 ; 3,0 -3,0 ; 3,2.5 -3,2.5
  silkscreen extent -1.86,-3.3 1.91,3.26
NL565050T [mm]
  rect 2x4.5 smd: 1(-3,0) 2(3,0)
  silkscreen extent -4.44,-2.54 4.44,2.54
RB.2/.4 [mm]
  round 1.2 hole 0.6: 1(0,0) 2(5.08,0)
  silkscreen extent -2.54,-5.08 7.62,5.08
RB.3/.6 [mm]
  round 1.6 hole 0.85: 1(0,0) 2(7.62,0)
  silkscreen extent -3.81,-7.62 11.43,7.62
RELAY-HFD2-L2 [mm]
  rect 2x2 hole 1.1: 1(0,0)
  round 2 hole 1.1: 2(0,-2.54) 4(0,-7.62) 6(0,-12.7) 8(0,-17.78) 9(7.62,-17.78) 11(7.62,-12.7) 13(7.62,-7.62) 15(7.62,-2.54) 16(7.62,0)
  silkscreen extent -2.54,-20.32 10.16,2.54
SMMBD914LT3G [mm]
  rect 0.9x0.8 smd: 1(-1,0.95) 2(-1,-0.95) 3(1,0)
  silkscreen extent -1.78,-1.78 1.78,1.78
SOP5 [mm]
  rect 1.5x0.8 smd: 1(0,0)
  rrect50% 1.5x0.8 smd: 3(0,-2.54) 4(6.3,-2.54) 5(6.3,-1.27) 6(6.3,0)
  silkscreen extent 1.59,-3.17 4.72,0.64
SOP16 [mm]
  rect 2x0.63 smd: 1(0,0)
  rrect50% 2x0.63 smd: 2(0,-1.27) 3(0,-2.54) 4(0,-3.81) 5(0,-5.08) 6(0,-6.35) 7(0,-7.62) 8(0,-8.89) 9(10,-8.89) 10(10,-7.62) 11(10,-6.35) 12(10,-5.08) 13(10,-3.81) 14(10,-2.54) 15(10,-1.27) 16(10,0)
  silkscreen extent 1.84,-9.53 8.17,0.64
SOT23_M [mm] "SOT23, 3-Leads, Body 2.9x1.3mm, Pitch 0.95mm, Lead Span 2.3mm, IPC Low Density"
  rect 1.6x0.6 smd: 1(-1.1,0.95) 2(-1.1,-0.95) 3(1.1,0)
  silkscreen extent -1.23,-1.5 0.7,1.92, body extent -0.7,-1.5 0.7,1.5, height 1.1
WIRE#1 [mil]
  rect 20x10 smd mask+5: 1(-15,0) 2(15,0)
  Top Layer lines w10: -45,0 -25,0 ; 25,0 45,0
  silkscreen extent -65,-20 65,20
WIRE#2 [mil]
  rect 20x10 smd mask+5: 1(-15,0) 2(15,0)
  Top Layer lines w10: -45,0 -41.69,0 -25,0 ; 25,0 45,0
  silkscreen extent -65,-20 65,20
WRB1205MD-10W [mm]
  round 2.5 hole 1.5: 1(-10.16,-2.54) 2(-10.16,2.54) 3(10.16,-10.16) 5(10.16,10.16)
  silkscreen extent -25.4,-12.7 25.4,12.7
WRH12400S [mm]
  round 2.5 hole 1.5: 1(-10.16,-2.54) 2(-10.16,2.54) 3(10.16,-10.16) 5(10.16,10.16)
  silkscreen extent -25.4,-12.7 25.4,12.7

## Part data
C1: "Capacitor, 1206"
C2 C3 C4 C5 C14 C15 C16 C17 C18 C19: "Capacitor, 0805"
C6 C7 C8 C9 C10 C11 C12 C13: "Capacitor"
D1 D2 D3 D5 D6: "Switching Diode"
D4 D7: "Voltage Stabilizing Diode, 2.4V"
FB1 FB2 FB3 FB4 FB5: "Chip Bead, 0805"
H1: library part Relay-HDF2-L2, "Relay, HDF2-XX-XX-L2-XX"
IA1: "IA1205S,12V to +5V,-5V"
J1: "Low Voltage Power Supply Connector"
L1 L2 L3 L6 L7: library part Inductor070704, "Chip Inductor, 7*7*4"
L4 L5: "NL565050T, 10mH, 150 ohm"
P1 P2: "BNC Elbow Connector"
Q1: "PNP Switching Transistor"
Q2: "TMOS E-FET Power Field Effect Transistor DPAK for Surface Mount"
Q3 Q4 Q5 Q6: "NPN Switching Transistor"
R1 R3 R4 R8 R9 R10 R11 R12 R13 R14 R16 R17: "Resistor, 1206, 1/4W"
R2: "Resistor, 2512, 1W"
R5 R6 R7: "Adjustable Resistor"
S1 S2: library part MSS-22C02, "Duble Switch"
U1: "Cyclone IV Family FPGA, 2V Core, 328 I/O Pins, 4 PLLs, 484-Pin FBGA, Speed Grade 7, Commercial Grade"
WRB1: "WRB1205MD-10W,12V-5V"
WRH1: "WRH12400S,12V-400V"

## Via types
v1: diameter 24, hole 12, Top Layer to Bottom Layer, 53 vias
v2: diameter 24, hole 12, Top Layer to Bottom Layer, tented bottom, 1 vias

## Nets (pads, with @x,y where several pads share a name; then routed paths per layer and width w, separated by ;. In a path a pad name is that pad's centre, name@x,y a point inside that pad or via, vN(x,y) a via of type N, cw(c..) or ccw(c..) an arc to the next point about the centre after c; other vN are vias at no path point)
12V: L6.2 Q1.2 R1.2 | length 884.7
  Top Layer w10: R1.2 5049.92,7117.4 Q1.2 5695,7524.09 L6.2@5720.08,7524.09
12VREF: L7.2 OT1.4 Q6.2 W2.1 W3.2 | length 4020.9
  Top Layer w10: OT1.4 v1(4900,5950) ; v1(4975,5695) 5390,5695 5417.6,5722.6 Q6.2 v1@5417.6,5902.6 ; L7.2 5395.98,7554.02 v1(5525,7425)
  Bottom Layer w10: v1(4900,5950) 4850,5950 4785,6015 4785,6185 ; v1(5425,5910) 5455,5940 5455,6020 5370,6105 4865,6105 4785,6185 ; v1(5525,7425) 5525,7355 5250,7080 4845,7080 4785,7020 4785,6185
400V: L4.2 R2.2 | length 3431.4
  Top Layer w10: L4.2 4245,7015 4510,7280 4510,7795 4685,7970 5820,7970 5960,7830 5960,7242.56 5792.44,7075 R2.2
400VREF: FB3.2 L5.2 | length 5190.2
  Top Layer w10: L5.2@4138.11,6730 L5.2 4208.11,6740 4245,6776.89 v1(4245,6970) ; v1(5860,6565) FB3.2 FB3.2@5980,6565
  Bottom Layer w10: v1(4245,6970) 4245,7015 4512.5,7282.5 ; 4510,7282.5 4510,7795 4685,7970 5820,7970 5960,7830 5960,7245 5790,7075 5535,7075 5500,7040 5500,6955 5530,6925 5800,6925 5875,6850 5875,6685 5855,6665 5700,6665 5680,6645 5680,6635.63 5700.63,6615 5810,6615 v1(5860,6565)
+5V: FB1.2 FB4.2 L1.2 OT1.6 | length 4538.6
  Top Layer w10: v1(3015,6075) L1.2@3015,6174.02 ; v1(4750,5775) OT1.6@4798.03,5775 ; FB4.2 v1(9905,6705) ; FB1.2 v1(9925,7600)
  Bottom Layer w10: v1(3015,6075) 3015,6030 3220,5825 4700,5825 ; v1(4750,5775) 4700,5825 ; v1(7050,5775) 6905,5775 6855,5825 4700,5825
+-5VREF: L3.2 W2.2 W4.2 | length 3330.5
  Top Layer w10: v1(3930,6075) L3.2@3930,6174.02
  Bottom Layer w10: v1(3930,6075) 3930,6045 4100,5875 4735,5875 ; v1(4810,5950) 4735,5875 ; v1(6955,5875) 4735,5875
-5V: FB2.1 FB5.1 L2.2 | length 4181.2
  Top Layer w10: v1(3230,6075) L2.2@3230,6174.02 ; FB5.1 v1(9905,6615) ; FB2.1 v1(9925,7505)
  Bottom Layer w10: v1(3230,6075) 3230,6035 3415,5850 6865,5850 6890,5825 v1(7050,5825)
ADCIN+: AMP2.11
ADCIN-: AMP2.10
AGND: D5.3 D6.1 D7.2 FB3.1 P1.2 P2.2 Q2.3 R6.a R7.a R8.1 W1.1 | length 1222.4
  Top Layer w10: Q2.3 5679.33,6634.33 5698.66,6615 6002.4,6615 FB3.1 v1(6185,6565) ; R6.a v1@6369.37,7749.37 ; R7.a v1@6689.37,7749.37 ; D7.2@6880,6677.32 v1(6880,6775) ; D5.3 7014.37,6845.63 v1(7085,6775) D6.1@7155.63,6845.63 ; v1(7795,6790) R8.1
  other v1: 8373.18,7283.18 6370,7750 6690,7750
D5V: C13.2 H1.1 H1.2 R3.1 WRB1.3 | length 3787.1
  Top Layer w10: v1(4275,5525) R3.1
  Bottom Layer w10: WRB1.3 1930,4255 1965,4290 1965,5680 C13.2 1845,5945.38 1806.38,5984 1806.38,6016 1829,6038.62 1861,6038.62 1883.62,6016 1883.62,5991.38 2075,5800 2480,5800 v1(2690,5590)
DGND: C13.1 Q3.2 Q4.2 Q5.2 W3.1 WRB1.5 | length 3141.2
  Top Layer w10: v1(4975,5605) 5054.29,5605 Q3.2 ; v1(5942.6,5352.6) Q5.2 ; v1@5945,5530 5947.6,5532.6 Q4.2
  Bottom Layer w10: C13.1 1865,5980 ; WRB1.5 2015,4255 1995,4275 1995,5685 1883.62,5796.38 1883.62,5816 1865,5834.62 1865,5980 ; v1(2690,5510) 2650,5550 2650,5601.72 2471.72,5780 2065,5780 1865,5980
  other v1: 5945,5532.6
DIVIDE: R10.1
GAINCTRL: AMP1.1 AMP1.8 AMP2.1 AMP2.8 | length 1702
  Top Layer w10: AMP2.8 v1(8900,6485) ; AMP2.1 v1(8900,6835) ; AMP1.8@8810,7380 v1(8925,7380) ; AMP1.1@8810,7730 v1(8920,7730)
  Bottom Layer w10: v1(8900,6485) 8935,6520 8935,6800 v1(8900,6835) 8925,6860 v1(8925,7380) ; v1(8920,7730) 8943.79,7706.21 cw(c8892.57,7655) 8965,7655 8965,7461.42 cw(c8865,7461.42) 8935.71,7390.71
GAINCTRLCM: AMP1.9 AMP1.16 AMP2.9 AMP2.16 | length 1713
  Top Layer w10: v1(9100,7380) AMP1.9 ; v1(9100,7730) AMP1.16@9203.7,7730 ; v1(9110,6485) AMP2.9 ; v1(9110,6835) AMP2.16
  Bottom Layer w10: v1(9100,7730) 9064.14,7694.14 ccw(c9098.28,7660) 9050,7660 9050,7471.42 ccw(c9150,7471.42) 9079.29,7400.71 v1(9100,7380) 9100,6845 v1(9110,6835) 9075,6800 9075,6520 v1(9110,6485)
NetAMP1_7: AMP1.7 C5.2 R12.1 | length 402.9
  Top Layer w10: AMP1.7@8780,7430 8715,7365 R12.1 8906.14,7252.32 ccw(c8906.14,7261.46) C5.2
NetAMP1_11: AMP1.11 C18.2 | length 625.1
  Top Layer w10: AMP1.11 9360,7480 9515,7325 9640,7325 9687.4,7277.6 C18.2
NetAMP1_12: AMP1.12 C3.1 FB2.2 | length 617.8
  Top Layer w10: AMP1.12 9442.24,7530 cw(c9442.24,7444.64) C3.1 9546.15,7461.45 ccw(c9610,7525.3) 9610,7435 ccw(c9610,7495.36) 9652.68,7452.68 9675.71,7475.71 cw(c9746.42,7405) 9746.42,7505 FB2.2
NetAMP1_13: AMP1.13 C2.1 FB1.1 | length 607.4
  Top Layer w10: AMP1.13 9454.31,7580 ccw(c9454.31,7648.28) C2.1 ; 9495,7625 9505.71,7635.71 cw(c9576.42,7565) 9576.42,7665 9623.58,7665 cw(c9623.58,7565) 9694.29,7635.71 9700.71,7629.29 ccw(c9771.42,7700) 9771.42,7600 FB1.1
NetAMP1_14: AMP1.14 C4.2 | length 697.7
  Top Layer w10: C4.2 9072.4,7316.18 ccw(c8972.4,7316.18) 9043.11,7386.89 cw(c9110.98,7454.76) 9015,7454.76 9015,7578.79 cw(c9066.21,7578.79) 9029.99,7614.99 9034.39,7619.39 cw(c9060,7593.79) 9060,7630 AMP1.14
NetAMP2_2: AMP2.2 C19.2 R16.1 | length 908
  Top Layer w10: AMP2.2 8915,6785 9200,7070 R16.1@9390,7070 ; R16.1@9402.68,7070 C19.2
NetAMP2_7: AMP2.7 C15.2 R17.1 | length 429.5
  Top Layer w10: R17.1 8715,6495 8755,6535 AMP2.7 ; R17.1@8717.32,6365 C15.2
NetAMP2_12: AMP2.12 C17.1 FB5.2 | length 573.4
  Top Layer w10: AMP2.12 C17.1@9497.6,6635 ; C17.1@9525.13,6615 9563.75,6576.38 9621.06,6576.38 9659.68,6615 FB5.2
NetAMP2_13: AMP2.13 C16.1 FB4.1 | length 573.4
  Top Layer w10: AMP2.13 C16.1@9497.6,6685 ; C16.1@9525.13,6705 9563.75,6743.62 9621.06,6743.62 9659.68,6705 FB4.1
NetAMP2_14: AMP2.14 C14.2 | length 602.9
  Top Layer w10: C14.2 9052.4,6652.4 9135,6735 AMP2.14
NetC1_1: C1.1 Q2.4 R2.1 | length 1507.5
  Top Layer w10: R2.1 5502.44,6953.23 5530.67,6925 5800,6925 Q2.4@5960,6765 ; Q2.4 6120.67,6605 6165,6605 6175,6615 6175,7042.32 C1.1
NetC1_2: C1.2 D1.3 R6.b | length 636.6
  Top Layer w10: R6.b 6417.32,7417.72 C1.2 6619.37,7150 D1.3
NetC4_1: C4.1 R12.2 | length 265.3
  Top Layer w10: R12.2 C4.1@8980.28,7117.68
NetC6_1: C6.1 IA1.9 L2.1 R14.2 | length 2415.4
  Top Layer w10: R14.2@2437.68,6227.68 2530,6320 IA1.9 ; C6.1 3330,6325.98 L2.1
  Bottom Layer w10: 2346.84,6475 2345.18,6476.65 ; IA1.9 2518.22,6440 2358.22,6280 2313.43,6280 2290,6303.43 2290,6451.84 2314.82,6476.65 2345.18,6476.65 ; C6.1 3114.62,6620 3029.62,6705 2920.38,6705 2836.38,6621 2836.38,6603.03 2730,6496.65 2506.53,6496.65 2486.53,6476.65 2345.18,6476.65
NetC6_2: C6.2 C8.1 IA1.10 L3.1 R13.1 R14.1 | length 2280.3
  Top Layer w10: R13.1 2317.32,6135 2610,6135 2630,6155 2630,6257.68 ; R14.1 2630,6257.68 ; IA1.10 2630,6257.68 ; C6.2 3679.02,6470.98 L3.1
  Bottom Layer w10: IA1.10 2646.65,6456.65 2754.94,6456.65 2861.64,6563.36 2901.64,6563.36 2943.28,6605 C8.1 3098.62,6581.38 3346,6581.38 3384.62,6620 C6.2
NetC7_1: C7.1 C9.1 C11.1 C12.1 IA1.2 J1.2 J1.2A J1.2B L7.1 WRB1.2 WRH1.2 | length 11640.1
  Top Layer w10: J1.2B 1074.65,7840 1060,7840 1050,7830 1050,7245 ; C7.1 1380,5959.62 1325.38,5905 1205,5905 1050,6060 1050,6630 ; C9.1 1380,6529.62 1325.38,6475 1205,6475 1050,6630 ; C12.1 1390,7150 1320,7080 1215,7080 1050,7245 ; v1(3395,6920) 3350,6875 1275,6875 1050,7100 ; C11.1 4935.38,7730 4974,7691.38 5210.39,7691.38 L7.1 ; 1050,6630 1050,7100 ; 1050,7100 1050,7245
  Bottom Layer w10: C9.1@1375,6675 C9.1 1380,6555 1458.35,6476.65 1757.87,6476.65 1794.52,6440 IA1.2 ; C7.1 1440,6045 1440,5250 1570.79,5119.21 1601.6,5119.21 1665.81,5055 WRB1.2 ; C12.1 2115,7280 2300,7465 WRH1.2 ; v1(3395,6920) 3439.69,6920 3464.69,6895 4420,6895 4435,6910 4435,7095 4790,7450 C11.1
NetC7_2: C7.2 C9.2 C11.2 C12.2 IA1.1 J1.1 J1.1A J1.1B L6.1 WRB1.1 WRH1.1 | length 11154.5
  Top Layer w10: C11.2 5020,7730 5165,7875 5585,7875 5654.02,7805.98 L6.1@5745,7805.98
  Bottom Layer w10: J1.1B 1328.58,7840 1060,7840 1050,7830 1050,7245 ; C12.2@1390,7090 C12.2 ; WRB1.1 1380,5250 C7.2 1205,5905 1050,6060 1050,6630 ; IA1.1@1713.35,6456.65 1450.06,6456.65 1431.72,6475 C9.2 1205,6475 1050,6630 ; WRH1.1 2220,7345 2130,7255 1455,7255 1405,7205 1405,7095 C12.2 ; C11.2 4880,7730 4810,7660 4810,7441.72 4776.25,7407.97 4776.25,7406.25 4455,7085 4455,6901.72 4428.28,6875 1275,6875 1050,7100 ; 1050,6630 1050,7100 ; 1050,7100 1050,7245 ; 1050,7245 1215,7080 C12.2
NetC8_2: C8.2 IA1.7 L1.1 R13.2 | length 1423.6
  Top Layer w10: R13.2 2110,6207.68 2110,6220 IA1.7 ; L1.1 2875,6285.98 C8.2
  Bottom Layer w10: IA1.7 2478.16,6440 2514.82,6476.65 2746.65,6476.65 C8.2
NetC10_1: C10.1 L5.1 WRH1.5 | length 2085.3
  Top Layer w10: L5.1 3890,6740 3831.89,6740 3735,6836.89 3735,7300 3980,7545 C10.1
  Bottom Layer w10: WRH1.5 3785,7845 3975,7655 3975,7650 C10.1
NetC10_2: C10.2 L4.1 WRH1.3 | length 3696.4
  Top Layer w10: L4.1 3906.89,6911.89 3835,6840 3795,6840 3770,6865 3770,7285 3980,7495 4230,7495 4280,7545 C10.2
  Bottom Layer w10: WRH1.3 3100,7720 3015,7805 3015,7890 3050,7925 3145,7925 3200,7870 3800,7870 3955,7715 4215,7715 C10.2
NetC14_1: C14.1 R17.2 | length 260.3
  Top Layer w10: R17.2@8717.32,6235 C14.1
NetC18_1: C18.1 R16.2 | length 207.6
  Top Layer w10: R16.2@9405,7215 C18.1
NetD1_1: D1.1 H1.4 R7.b | length 1857.2
  Top Layer w10: H1.4 6635,5755 6687.4,5807.4 D1.1 6650,7296.77 R7.b
NetD2_1: D2.1 D3.3 S1.c | length 490.6
  Top Layer w10: D2.1 7025.63,7189.37 D3.3 7350,7189.37 S1.c@7466.89,7072.48
NetD2_3: D2.3 D5.1 | length 200
  Top Layer w10: D2.3 6987.6,6959.17 D5.1
NetD3_1: D3.1 D6.3 | length 203.8
  Top Layer w10: D3.1 7157.6,6966.77 D6.3
NetD4_1: D4.1 D7.1 | length 160.4
  Top Layer w10: D7.1 D4.1
NetD4_2: D4.2 S1.b | length 257.7
  Top Layer w10: D4.2 7466.89,6834.57 S1.b@7466.89,6866.57
NetH1_6: H1.6 P1.1 | length 1997.5
  Signal w10: H1.6 6730,5955 6945,6170 6945,7110 7255,7420 P1.1
NetH1_8: H1.8 P2.1 R5.a | length 3081.8
  Top Layer w10: v1(6730,6155) 6775,6200 6775,7335 6805,7365 7975,7365 ; R5.a 7989.37,7350.63 7975,7365 ; P2.1 8030,7420 7975,7365
  Bottom Layer w10: H1.8 v1(6730,6155)
NetH1_15: H1.15 Q4.3 | length 177.9
  Top Layer w10: Q4.3 6175,5570 6190,5555 H1.15
NetH1_16: H1.16 Q5.3 | length 166.9
  Top Layer w10: Q5.3@6125,5390 6190,5455 H1.16
NetJ1_3: J1.3 J1.3A J1.3B
NetOT1_1: OT1.1 R3.2 | length 192.7
  Top Layer w10: R3.2 OT1.1
NetOT1_3: OT1.3 Q3.3 | length 191.7
  Top Layer w10: OT1.3 Q3.3@5091.69,5525
NetOT1_5: OT1.5 Q6.3 R1.1 R4.1 | length 2614.7
  Top Layer w10: OT1.5 4850,5856 4783,5923 4783,6185 ; R4.1 4808,7005 4783,6980 ; R1.1 4783,7050.32 4783,6980 ; Q6.3 5455,6020 5370,6105 4863,6105 4783,6185 ; 4783,6185 4783,6980
NetQ1_1: Q1.1 R4.2 | length 286.6
  Top Layer w10: R4.2 5054.92,7042.6 Q1.1
NetQ1_3: Q1.3 Q2.1 | length 641.8
  Top Layer w10: Q1.3 5345,7080 5409.33,7015.67 5409.33,6890.67 5450,6850 Q2.1@5675,6850
NetQ3_1: Q3.1 S2.c | length 164
  Top Layer w10: Q3.1 S2.c@5296.38,5608.31
NetQ4_1: Q4.1 R10.2 | length 389.5
  Top Layer w10: R10.2 5695.08,5607.4 Q4.1
NetQ5_1: Q5.1 R11.2 | length 268.4
  Top Layer w10: R11.2 5919.92,5427.4 Q5.1
NetQ6_1: Q6.1 S2.b | length 179.2
  Top Layer w10: S2.b@5493.43,5608.11 Q6.1@5493.43,5787.28
NetR9_2: R9.2 S2.a | length 813.9
  Top Layer w10: R9.2 5239.85,5370 5276.58,5333.27 5356.38,5333.27 S2.a@5395,5371.89
SIGNALGND: AMP1.3 AMP1.4 AMP1.5 AMP1.6 AMP1.10 AMP1.15 AMP2.3 AMP2.4 AMP2.5 AMP2.6 AMP2.15 C2.2 C3.2 C5.1 C15.1 C16.2 C17.2 C19.1 W1.2 W4.1 | length 1593.9
  Top Layer w10: v1@8730,7630 AMP1.3@8810,7630 ; AMP2.5 8835,6660 ; AMP2.4 8835,6660 ; AMP1.6 8875,7480 v1(8925,7530) ; AMP1.5 v1(8925,7530) ; AMP1.4 8875,7580 v1(8925,7530) ; AMP2.6@8825,6585 v1(8900,6660) AMP2.3@8825,6735 ; v1@8890,6660 8835,6660 ; C15.1@8980,6367.4 v2(8980,6435) ; C5.1 v1(8987.4,7318.73) cw(c8996.27,7318.73) v1@8990,7325 ; v1(9100,7680) AMP1.15@9203.7,7680 ; v1(9110,6785) AMP2.15 ; v1@9110,7430 AMP1.10 ; C3.2 ccw(c9577.4,7559.56) 9615.98,7520.98 v1(9645,7550) 9607.44,7587.56 ccw(c9577.4,7557.51) C2.2 ; C17.2@9610,6615 v1(9655,6660) C16.2@9610,6705 ; C19.1 v1(9760,7070)
  other v1: 7045,5875 8436.82,7346.82 9100,7430 8720,7630
SINGLE: R11.1
TRIG: R9.1
WAVESIGNAL: AMP1.2 R5.b R8.2 S1.a | length 1615.1
  Top Layer w10: S1.a@7703.15,6965.04 R5.b ; R8.2 7950,6867.32 R5.b ; AMP1.2 8792.4,7657.4 8709.22,7657.4 8016.86,6965.04 R5.b
pads on no net: D1.2 D2.2 D3.2 D5.2 D6.2 H1.9 H1.11 H1.13 R5.c R6.c R7.c S1. S2. U1.A1 U1.A2 U1.A3 U1.A4 U1.A5 U1.A6 U1.A7 U1.A8 U1.A9 U1.A10 U1.A11 U1.A12 U1.A13 U1.A14 U1.A15 U1.A16 U1.A17 U1.A18 U1.A19 U1.A20 U1.A21 U1.A22 U1.AA1 U1.AA2 U1.AA3 U1.AA4 U1.AA5 U1.AA6 U1.AA7 U1.AA8 U1.AA9 U1.AA10 U1.AA11 U1.AA12 U1.AA13 U1.AA14 U1.AA15 U1.AA16 U1.AA17 U1.AA18 U1.AA19 U1.AA20 U1.AA21 U1.AA22 U1.AB1 U1.AB2 U1.AB3 U1.AB4 U1.AB5 U1.AB6 U1.AB7 U1.AB8 U1.AB9 U1.AB10 U1.AB11 U1.AB12 U1.AB13 U1.AB14 U1.AB15 U1.AB16 U1.AB17 U1.AB18 U1.AB19 U1.AB20 U1.AB21 U1.AB22 U1.B1 U1.B2 U1.B3 U1.B4 U1.B5 U1.B6 U1.B7 U1.B8 U1.B9 U1.B10 U1.B11 U1.B12 U1.B13 U1.B14 U1.B15 U1.B16 U1.B17 U1.B18 U1.B19 U1.B20 U1.B21 U1.B22 U1.C1 U1.C2 U1.C3 U1.C4 U1.C5 U1.C6 U1.C7 U1.C8 U1.C9 U1.C10 U1.C11 U1.C12 U1.C13 U1.C14 U1.C15 U1.C16 U1.C17 U1.C18 U1.C19 U1.C20 U1.C21 U1.C22 U1.D1 U1.D2 U1.D3 U1.D4 U1.D5 U1.D6 U1.D7 U1.D8 U1.D9 U1.D10 U1.D11 U1.D12 U1.D13 U1.D14 U1.D15 U1.D16 U1.D17 U1.D18 U1.D19 U1.D20 U1.D21 U1.D22 U1.E1 U1.E2 U1.E3 U1.E4 U1.E5 U1.E6 U1.E7 U1.E8 U1.E9 U1.E10 U1.E11 U1.E12 U1.E13 U1.E14 U1.E15 U1.E16 U1.E17 U1.E18 U1.E19 U1.E20 U1.E21 U1.E22 U1.F1 U1.F2 U1.F3 U1.F4 U1.F5 U1.F6 U1.F7 U1.F8 U1.F9 U1.F10 U1.F11 U1.F12 U1.F13 U1.F14 U1.F15 U1.F16 U1.F17 U1.F18 U1.F19 U1.F20 U1.F21 U1.F22 U1.G1 U1.G2 U1.G3 U1.G4 U1.G5 U1.G6 U1.G7 U1.G8 U1.G9 U1.G10 U1.G11 U1.G12 U1.G13 U1.G14 U1.G15 U1.G16 U1.G17 U1.G18 U1.G19 U1.G20 U1.G21 U1.G22 U1.H1 U1.H2 U1.H3 U1.H4 U1.H5 U1.H6 U1.H7 U1.H8 U1.H9 U1.H10 U1.H11 U1.H12 U1.H13 U1.H14 U1.H15 U1.H16 U1.H17 U1.H18 U1.H19 U1.H20 U1.H21 U1.H22 U1.J1 U1.J2 U1.J3 U1.J4 U1.J5 U1.J6 U1.J7 U1.J8 U1.J9 U1.J10 U1.J11 U1.J12 U1.J13 U1.J14 U1.J15 U1.J16 U1.J17 U1.J18 U1.J19 U1.J20 U1.J21 U1.J22 U1.K1 U1.K2 U1.K3 U1.K4 U1.K5 U1.K6 U1.K7 U1.K8 U1.K9 U1.K10 U1.K11 U1.K12 U1.K13 U1.K14 U1.K15 U1.K16 U1.K17 U1.K18 U1.K19 U1.K20 U1.K21 U1.K22 U1.L1 U1.L2 U1.L3 U1.L4 U1.L5 U1.L6 U1.L7 U1.L8 U1.L9 U1.L10 U1.L11 U1.L12 U1.L13 U1.L14 U1.L15 U1.L16 U1.L17 U1.L18 U1.L19 U1.L20 U1.L21 U1.L22 U1.M1 U1.M2 U1.M3 U1.M4 U1.M5 U1.M6 U1.M7 U1.M8 U1.M9 U1.M10 U1.M11 U1.M12 U1.M13 U1.M14 U1.M15 U1.M16 U1.M17 U1.M18 U1.M19 U1.M20 U1.M21 U1.M22 U1.N1 U1.N2 U1.N3 U1.N4 U1.N5 U1.N6 U1.N7 U1.N8 U1.N9 U1.N10 U1.N11 U1.N12 U1.N13 U1.N14 U1.N15 U1.N16 U1.N17 U1.N18 U1.N19 U1.N20 U1.N21 U1.N22 U1.P1 U1.P2 U1.P3 U1.P4 U1.P5 U1.P6 U1.P7 U1.P8 U1.P9 U1.P10 U1.P11 U1.P12 U1.P13 U1.P14 U1.P15 U1.P16 U1.P17 U1.P18 U1.P19 U1.P20 U1.P21 U1.P22 U1.R1 U1.R2 U1.R3 U1.R4 U1.R5 U1.R6 U1.R7 U1.R8 U1.R9 U1.R10 U1.R11 U1.R12 U1.R13 U1.R14 U1.R15 U1.R16 U1.R17 U1.R18 U1.R19 U1.R20 U1.R21 U1.R22 U1.T1 U1.T2 U1.T3 U1.T4 U1.T5 U1.T6 U1.T7 U1.T8 U1.T9 U1.T10 U1.T11 U1.T12 U1.T13 U1.T14 U1.T15 U1.T16 U1.T17 U1.T18 U1.T19 U1.T20 U1.T21 U1.T22 U1.U1 U1.U2 U1.U3 U1.U4 U1.U5 U1.U6 U1.U7 U1.U8 U1.U9 U1.U10 U1.U11 U1.U12 U1.U13 U1.U14 U1.U15 U1.U16 U1.U17 U1.U18 U1.U19 U1.U20 U1.U21 U1.U22 U1.V1 U1.V2 U1.V3 U1.V4 U1.V5 U1.V6 U1.V7 U1.V8 U1.V9 U1.V10 U1.V11 U1.V12 U1.V13 U1.V14 U1.V15 U1.V16 U1.V17 U1.V18 U1.V19 U1.V20 U1.V21 U1.V22 U1.W1 U1.W2 U1.W3 U1.W4 U1.W5 U1.W6 U1.W7 U1.W8 U1.W9 U1.W10 U1.W11 U1.W12 U1.W13 U1.W14 U1.W15 U1.W16 U1.W17 U1.W18 U1.W19 U1.W20 U1.W21 U1.W22 U1.Y1 U1.Y2 U1.Y3 U1.Y4 U1.Y5 U1.Y6 U1.Y7 U1.Y8 U1.Y9 U1.Y10 U1.Y11 U1.Y12 U1.Y13 U1.Y14 U1.Y15 U1.Y16 U1.Y17 U1.Y18 U1.Y19 U1.Y20 U1.Y21 U1.Y22

## Polygon pours and split planes (outlines as drawn)
SIGNALGND on Ground (split plane): 9979.9,5655.1 7005.1,5655.1 7005.1,6594.9 8400,6594.9 8401.95,6595.29 8403.6,6596.4 8404.71,6598.05 8405.1,6600 8405.1,7979.9 9979.9,7979.9
AGND on Ground (split plane): 8394.9,6605.1 7000,6605.1 6998.05,6604.71 6996.4,6603.6 6995.29,6601.95 6994.9,6600 6994.9,5655.1 6155.1,5655.1 6155.1,7979.9 8394.9,7979.9
DGND on Ground (split plane): 9979.9,1020.1 2555.1,1020.1 2555.1,5644.9 9979.9,5644.9
no net on Ground (split plane): 6144.9,5655.1 1020.1,5655.1 1020.1,7979.9 6144.9,7979.9
no net on Ground (split plane): 2544.9,1020.1 1020.1,1020.1 1020.1,5644.9 2544.9,5644.9
+5V on Power (split plane): 9979.9,5655.1 7005.1,5655.1 7005.1,6594.9 8400,6594.9 8401.95,6595.29 8403.6,6596.4 8404.71,6598.05 8405.1,6600 8405.1,7979.9 9979.9,7979.9
D5V on Power (split plane): 9979.9,1020.1 2555.1,1020.1 2555.1,5644.9 9979.9,5644.9
no net on Power (split plane): 8394.9,6605.1 7000,6605.1 6998.05,6604.71 6996.4,6603.6 6995.29,6601.95 6994.9,6600 6994.9,5655.1 1020.1,5655.1 1020.1,7979.9 8394.9,7979.9
no net on Power (split plane): 2544.9,1020.1 1020.1,1020.1 1020.1,5644.9 2544.9,5644.9
-5V on Power2 (split plane): 9979.9,5655.1 7005.1,5655.1 7005.1,6594.9 8400,6594.9 8401.95,6595.29 8403.6,6596.4 8404.71,6598.05 8405.1,6600 8405.1,7979.9 9979.9,7979.9
-5V on Power2 (split plane): 9979.9,1020.1 2555.1,1020.1 2555.1,5644.9 9979.9,5644.9
-5V on Power2 (split plane): 8394.9,6605.1 7000,6605.1 6998.05,6604.71 6996.4,6603.6 6995.29,6601.95 6994.9,6600 6994.9,5657.11 6992.89,5655.1 1020.1,5655.1 1020.1,7979.9 8394.9,7979.9
-5V on Power2 (split plane): 2544.9,1020.1 1020.1,1020.1 1020.1,5644.9 2544.9,5644.9
no net on Signal2 (split plane): 9979.9,1020.1 1020.1,1020.1 1020.1,7979.9 9979.9,7979.9
SIGNALGND on Ground2 (split plane): 9979.9,5655.1 7005.1,5655.1 7005.1,6594.9 8400,6594.9 8401.95,6595.29 8403.6,6596.4 8404.71,6598.05 8405.1,6600 8405.1,7979.9 9979.9,7979.9
DGND on Ground2 (split plane): 9979.9,1020.1 2555.1,1020.1 2555.1,5644.9 9979.9,5644.9
no net on Ground2 (split plane): 8394.9,6605.1 7000,6605.1 6998.05,6604.71 6996.4,6603.6 6995.29,6601.95 6994.9,6600 6994.9,5655.1 1020.1,5655.1 1020.1,7979.9 8394.9,7979.9
no net on Ground2 (split plane): 2544.9,1020.1 1020.1,1020.1 1020.1,5644.9 2544.9,5644.9

## Keep-outs
Keep-Out Layer:
  the board outline again, w10

## Other copper
Ground (plane layer: these items are gaps in the copper):
  lines w10: 1000,5650 6150,5650 ; 2550,1000 2550,5650 ; 6150,8000 6150,5650 ; 7000,5650 7000,6600 8400,6600 8400,8000 ; 10000,5650 6150,5650
Power (plane layer: these items are gaps in the copper):
  lines w10: 1000,5650 7000,5650 ; 2550,1000 2550,5650 ; 8400,8000 8400,6600 7000,6600 7000,5650 ; 10000,5650 7000,5650
Ground2 (plane layer: these items are gaps in the copper):
  lines w10: 1000,5650 7000,5650 ; 2550,1000 2550,5650 ; 8400,8000 8400,6600 7000,6600 7000,5650 ; 10000,5645 9995,5650 7000,5650
Power2 (plane layer: these items are gaps in the copper):
  lines w10: 1000,5650 7000,5650 ; 2550,1000 2550,5650 ; 8400,8000 8400,6600 7000,6600 7000,5655 6995,5650 9995,5650 10000,5655

## Text inside footprints (layer, text, board x,y; h text height)
J1: Mechanical 1 "Mech 2 - Clearance, move to internal plane if present" at 851.26,7939.44 h11.81; Mechanical 1 "Mech 1 - Slot cut-out" at 851.26,7959.13 h11.81; Mechanical 1 "Assign keep-out area to slot" at 851.26,7998.5 h11.81; Mechanical 1 "Alert PCB fab to slot details" at 851.26,7978.81 h11.81